# EAGLE board Qwiic Sound Trigger-Panel (EAGLE 9.6.2), part 1 of 5
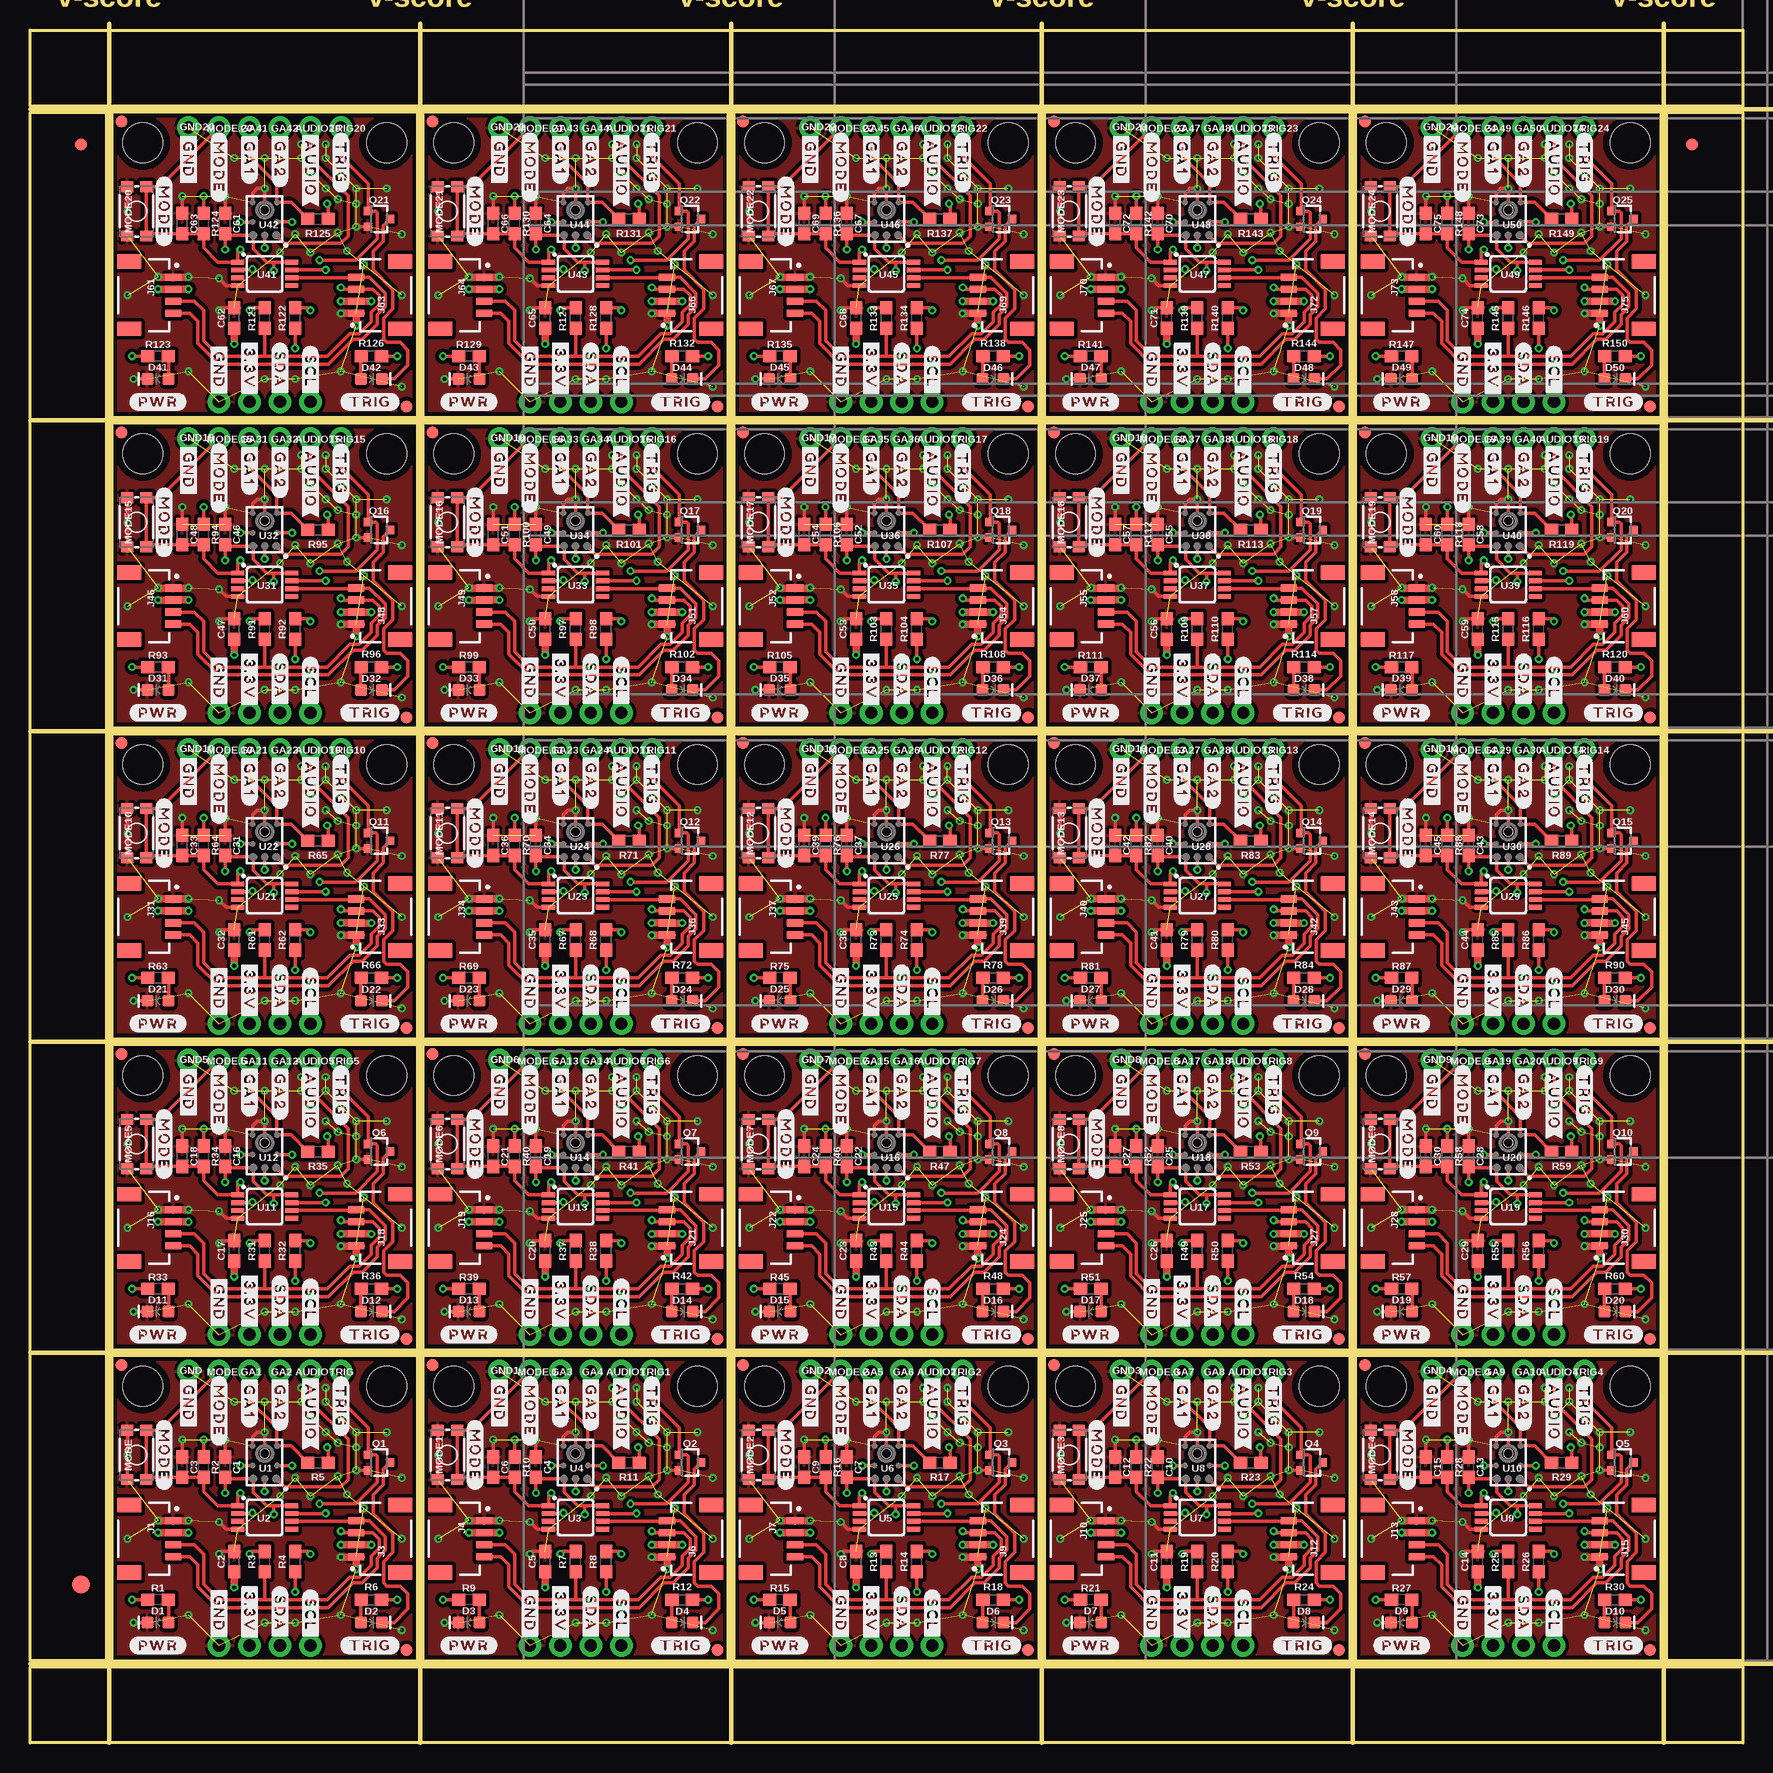
[diagram p0: board, top side]
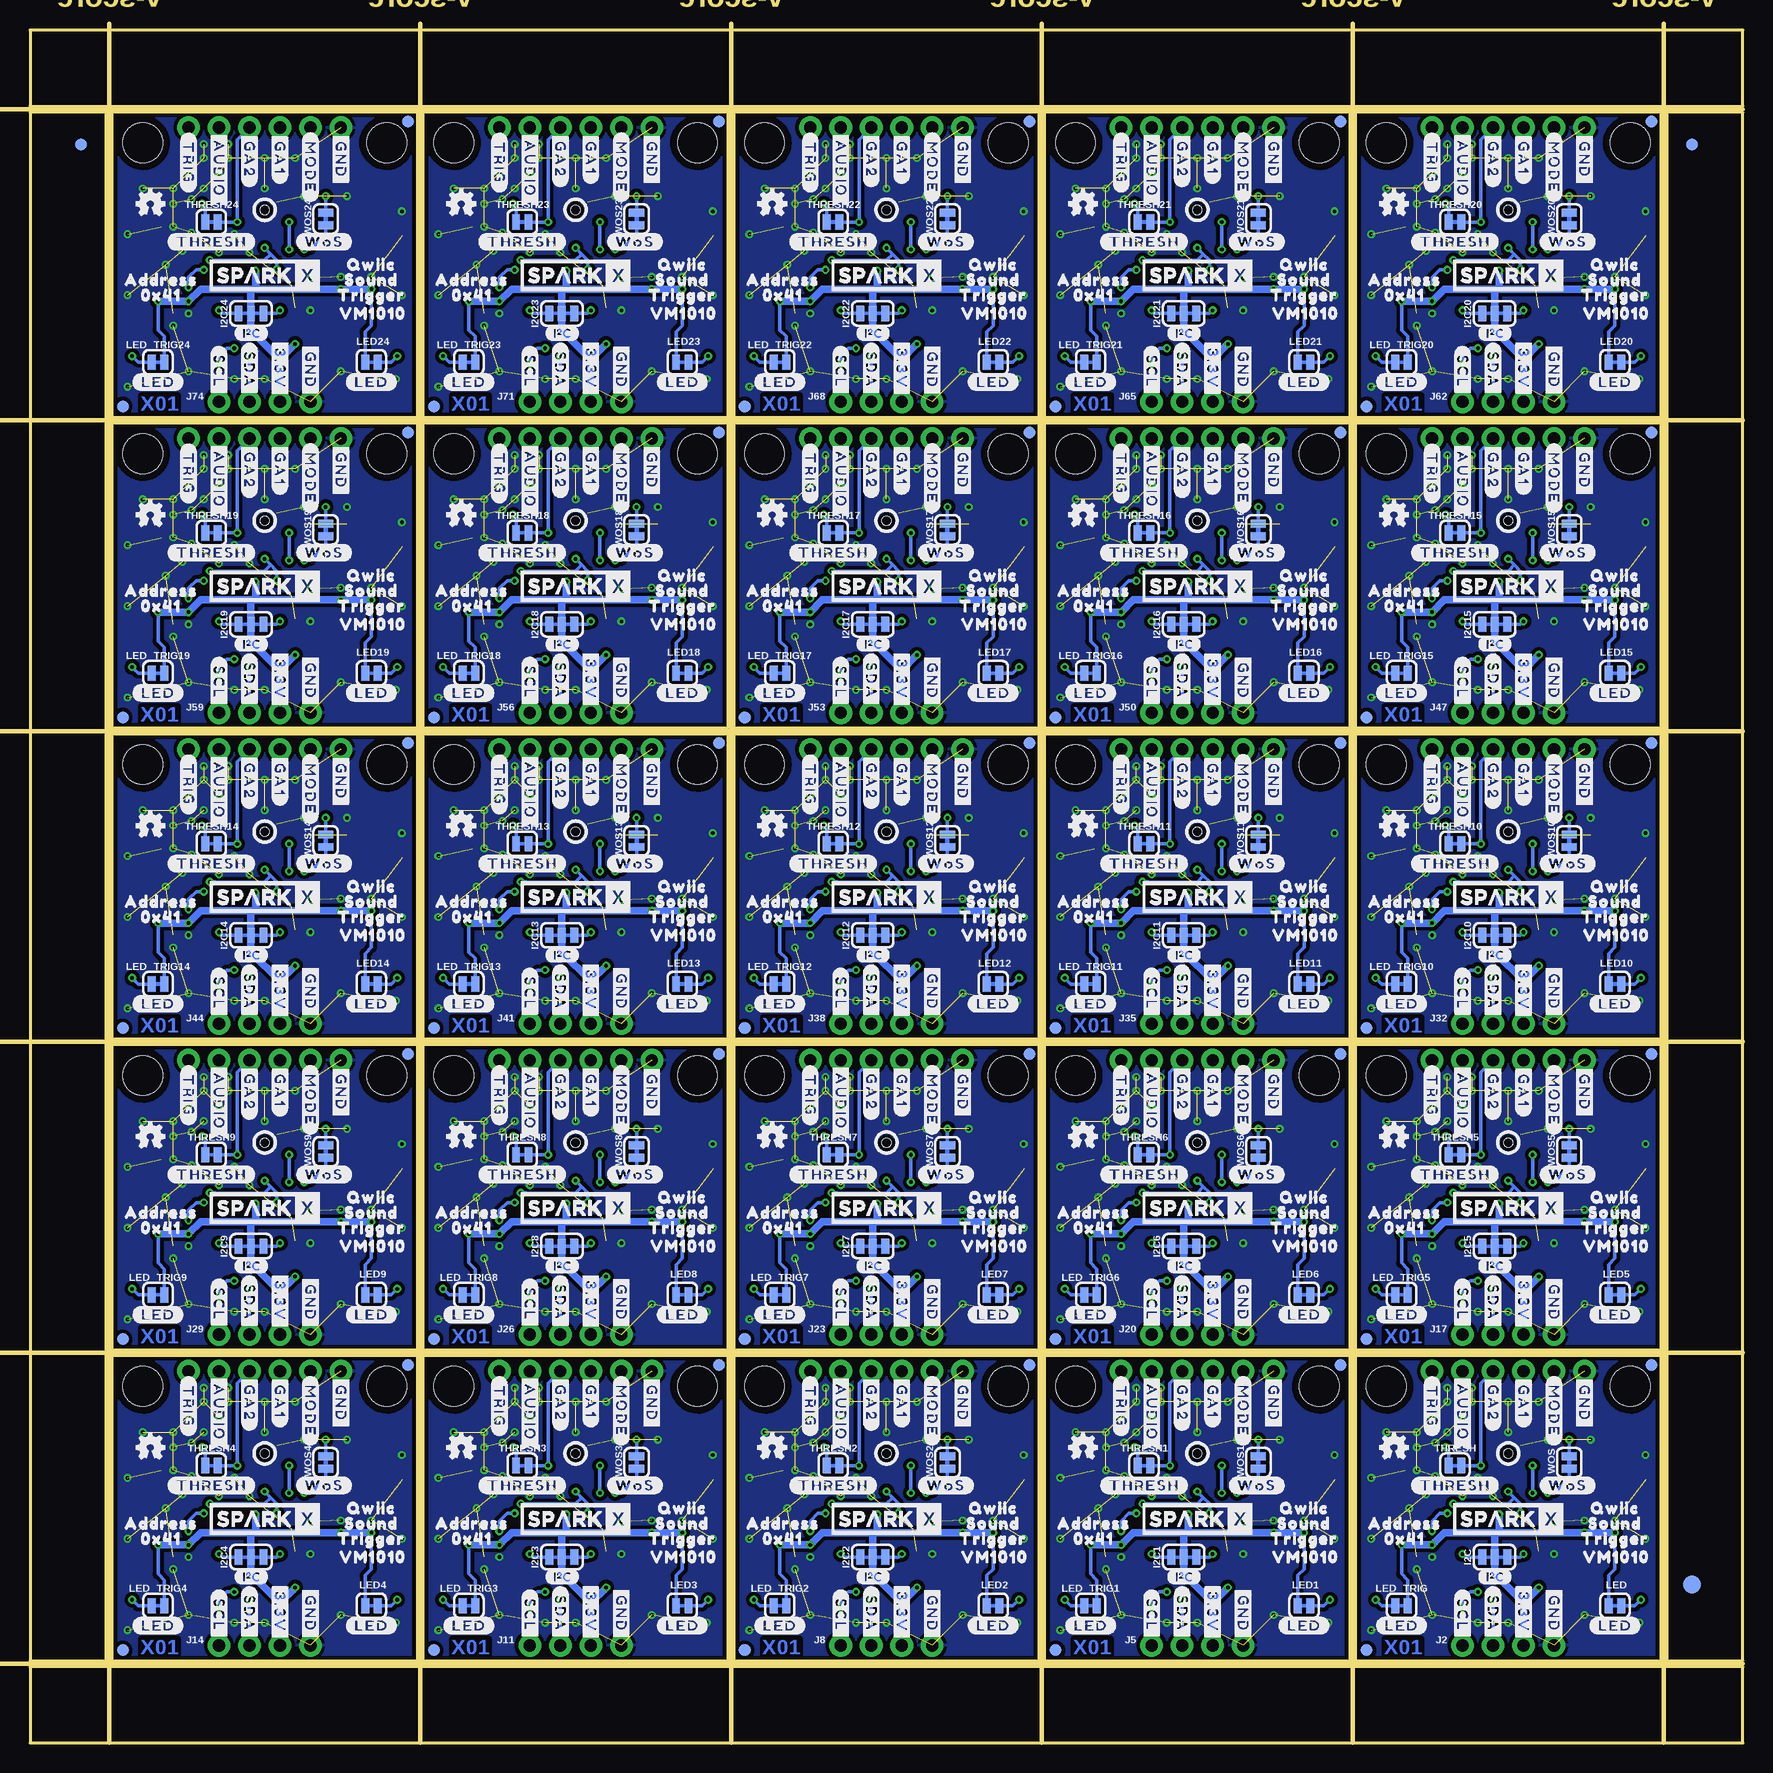
[diagram p1: board, bottom side, seen from below]

Size 142.75 x 142.75 mm. Coordinates in mm from the lower left corner, seen from the top.
Outline: 6.86,6.86 6.86,32.26 32.26,32.26 32.26,6.86 6.86,6.86
Outline: 32.77,6.86 32.77,32.26 58.17,32.26 58.17,6.86 32.77,6.86
Outline: 58.67,6.86 58.67,32.26 84.07,32.26 84.07,6.86 58.67,6.86
Outline: 84.58,6.86 84.58,32.26 109.98,32.26 109.98,6.86 84.58,6.86
Outline: 110.49,6.86 110.49,32.26 135.89,32.26 135.89,6.86 110.49,6.86
Outline: 6.86,32.77 6.86,58.17 32.26,58.17 32.26,32.77 6.86,32.77
Outline: 32.77,32.77 32.77,58.17 58.17,58.17 58.17,32.77 32.77,32.77
Outline: 58.67,32.77 58.67,58.17 84.07,58.17 84.07,32.77 58.67,32.77
Outline: 84.58,32.77 84.58,58.17 109.98,58.17 109.98,32.77 84.58,32.77
Outline: 110.49,32.77 110.49,58.17 135.89,58.17 135.89,32.77 110.49,32.77
Outline: 6.86,58.67 6.86,84.07 32.26,84.07 32.26,58.67 6.86,58.67
Outline: 32.77,58.67 32.77,84.07 58.17,84.07 58.17,58.67 32.77,58.67
Outline: 58.67,58.67 58.67,84.07 84.07,84.07 84.07,58.67 58.67,58.67
Outline: 84.58,58.67 84.58,84.07 109.98,84.07 109.98,58.67 84.58,58.67
Outline: 110.49,58.67 110.49,84.07 135.89,84.07 135.89,58.67 110.49,58.67
Outline: 6.86,84.58 6.86,109.98 32.26,109.98 32.26,84.58 6.86,84.58
Outline: 32.77,84.58 32.77,109.98 58.17,109.98 58.17,84.58 32.77,84.58
Outline: 58.67,84.58 58.67,109.98 84.07,109.98 84.07,84.58 58.67,84.58
Outline: 84.58,84.58 84.58,109.98 109.98,109.98 109.98,84.58 84.58,84.58
Outline: 110.49,84.58 110.49,109.98 135.89,109.98 135.89,84.58 110.49,84.58
Outline: 6.86,110.49 6.86,135.89 32.26,135.89 32.26,110.49 6.86,110.49
Outline: 32.77,110.49 32.77,135.89 58.17,135.89 58.17,110.49 32.77,110.49
Outline: 58.67,110.49 58.67,135.89 84.07,135.89 84.07,110.49 58.67,110.49
Outline: 84.58,110.49 84.58,135.89 109.98,135.89 109.98,110.49 84.58,110.49
Outline: 110.49,110.49 110.49,135.89 135.89,135.89 135.89,110.49 110.49,110.49
Outline: 0,6.35 142.75,6.35 142.75,0 0,0 0,6.35
Outline: 136.4,135.89 142.75,135.89 142.75,6.86 136.4,6.86 136.4,135.89
Outline: 0,142.75 142.75,142.75 142.75,136.4 0,136.4 0,142.75
Outline: 0,135.89 6.35,135.89 6.35,6.86 0,6.86 0,135.89
Copper layers (1*16): Top 0.035mm / dielectric 1.5mm / Bottom 0.035mm
Design rules "Qwiic Sound Trigger": minimum track width 7mil, minimum drill 0.3mm, track to track 7mil, track to pad 7mil, pad to pad 7mil, via to via 7mil, smd to smd 7mil, copper to edge 7mil, drill to drill 7mil, minimum pad ring 7mil, minimum via ring 7mil, stop-mask expansion 3mil, vias tented up to drill 25mil, thermal gap 10mil
Milling: 12 lines

## Footprints (pad centres in the part's own frame; a part is rotated, then mirrored left to right if it is on the bottom)
1X01_NO_SILK = drill 1.016 pad 1.88: 1 0,0
0603 = smd 1.1 x 1: 1 -0.85,0; 2 0.85,0
LED-0603 = smd 1 x 1: A -0.877,0; C 0.877,0
FIDUCIAL-1X2 = smd 1 x 1: 1 0,0
FIDUCIAL-1.5X3 = smd 1.5 x 1.5: 1 0,0
SMT-JUMPER_3_2-NC_TRACE_SILK = smd 0.66 x 1.27: 1 -1.041,0; 2 0,0; 3 1.041,0
JST04_1MM_RA = smd 0.6 x 1.35: 1 -1.5,0; 2 -0.5,0; 3 0.5,0; 4 1.5,0 | smd 1.2 x 2: NC1 2.8,-3.675; NC2 -2.8,-3.675
1X04_NO_SILK = drill 1.016 pad 1.88: 1 0,0; 2 2.54,0; 3 5.08,0; 4 7.62,0
STAND-OFF = hole 3.302: 0,0
SMT-JUMPER_2_NC_TRACE_SILK = smd 0.66 x 1.27: 1 -0.521,0; 2 0.521,0
TACTILE_SWITCH_SMD_4.6X2.8MM = smd 0.9 x 1: 1 -2.05,-0.8; 2 2.05,-0.8; 3 2.05,0.8; 4 -2.05,0.8
SOT323 = smd 0.7 x 0.7: 1 -0.65,-0.925; 2 0.65,-0.925; 3 0,0.925
VM1010 = smd 0.65 x 0.65: 1 1.35,0.965; 6 1.35,-0.965 | smd 0.46 x 0.46: 2 0.25,1.015; 3 -1.39,1.015; 4 -1.39,-1.015; 5 0.25,-1.015 | smd 0.6 x 0.6: 7 1.35,0 | smd 0.25 x 0.25: 8 -1.38,0 | hole 0.75: -0.75,0
MSOP8 = smd 1.1 x 0.4: 1 -2.25,0.975; 2 -2.25,0.325; 3 -2.25,-0.325; 4 -2.25,-0.975; 5 2.25,-0.975; 6 2.25,-0.325; 7 2.25,0.325; 8 2.25,0.975

## Placement (x,y rotation side)
AUDIO  [1X01_NO_SILK]  23.37,30.99 0 top
AUDIO1  [1X01_NO_SILK]  49.28,30.99 0 top
AUDIO2  [1X01_NO_SILK]  75.18,30.99 0 top
AUDIO3  [1X01_NO_SILK]  101.09,30.99 0 top
AUDIO4  [1X01_NO_SILK]  127,30.99 0 top
AUDIO5  [1X01_NO_SILK]  23.37,56.9 0 top
AUDIO6  [1X01_NO_SILK]  49.28,56.9 0 top
AUDIO7  [1X01_NO_SILK]  75.18,56.9 0 top
AUDIO8  [1X01_NO_SILK]  101.09,56.9 0 top
AUDIO9  [1X01_NO_SILK]  127,56.9 0 top
AUDIO10  [1X01_NO_SILK]  23.37,82.8 0 top
AUDIO11  [1X01_NO_SILK]  49.28,82.8 0 top
AUDIO12  [1X01_NO_SILK]  75.18,82.8 0 top
AUDIO13  [1X01_NO_SILK]  101.09,82.8 0 top
AUDIO14  [1X01_NO_SILK]  127,82.8 0 top
AUDIO15  [1X01_NO_SILK]  23.37,108.71 0 top
AUDIO16  [1X01_NO_SILK]  49.28,108.71 0 top
AUDIO17  [1X01_NO_SILK]  75.18,108.71 0 top
AUDIO18  [1X01_NO_SILK]  101.09,108.71 0 top
AUDIO19  [1X01_NO_SILK]  127,108.71 0 top
AUDIO20  [1X01_NO_SILK]  23.37,134.62 0 top
AUDIO21  [1X01_NO_SILK]  49.28,134.62 0 top
AUDIO22  [1X01_NO_SILK]  75.18,134.62 0 top
AUDIO23  [1X01_NO_SILK]  101.09,134.62 0 top
AUDIO24  [1X01_NO_SILK]  127,134.62 0 top
C1  0.1uF  [0603]  16.26,22.99 90 top
C2  1.0uF  [0603]  17.02,15.11 90 top
C3  0.1uF  [0603]  12.7,22.99 90 top
C4  0.1uF  [0603]  42.16,22.99 90 top
C5  1.0uF  [0603]  42.93,15.11 90 top
C6  0.1uF  [0603]  38.61,22.99 90 top
C7  0.1uF  [0603]  68.07,22.99 90 top
C8  1.0uF  [0603]  68.83,15.11 90 top
C9  0.1uF  [0603]  64.52,22.99 90 top
C10  0.1uF  [0603]  93.98,22.99 90 top
C11  1.0uF  [0603]  94.74,15.11 90 top
C12  0.1uF  [0603]  90.42,22.99 90 top
C13  0.1uF  [0603]  119.89,22.99 90 top
C14  1.0uF  [0603]  120.65,15.11 90 top
C15  0.1uF  [0603]  116.33,22.99 90 top
C16  0.1uF  [0603]  16.26,48.89 90 top
C17  1.0uF  [0603]  17.02,41.02 90 top
C18  0.1uF  [0603]  12.7,48.89 90 top
C19  0.1uF  [0603]  42.16,48.89 90 top
C20  1.0uF  [0603]  42.93,41.02 90 top
C21  0.1uF  [0603]  38.61,48.89 90 top
C22  0.1uF  [0603]  68.07,48.89 90 top
C23  1.0uF  [0603]  68.83,41.02 90 top
C24  0.1uF  [0603]  64.52,48.89 90 top
C25  0.1uF  [0603]  93.98,48.89 90 top
C26  1.0uF  [0603]  94.74,41.02 90 top
C27  0.1uF  [0603]  90.42,48.89 90 top
C28  0.1uF  [0603]  119.89,48.89 90 top
C29  1.0uF  [0603]  120.65,41.02 90 top
C30  0.1uF  [0603]  116.33,48.89 90 top
C31  0.1uF  [0603]  16.26,74.8 90 top
C32  1.0uF  [0603]  17.02,66.93 90 top
C33  0.1uF  [0603]  12.7,74.8 90 top
C34  0.1uF  [0603]  42.16,74.8 90 top
C35  1.0uF  [0603]  42.93,66.93 90 top
C36  0.1uF  [0603]  38.61,74.8 90 top
C37  0.1uF  [0603]  68.07,74.8 90 top
C38  1.0uF  [0603]  68.83,66.93 90 top
C39  0.1uF  [0603]  64.52,74.8 90 top
C40  0.1uF  [0603]  93.98,74.8 90 top
C41  1.0uF  [0603]  94.74,66.93 90 top
C42  0.1uF  [0603]  90.42,74.8 90 top
C43  0.1uF  [0603]  119.89,74.8 90 top
C44  1.0uF  [0603]  120.65,66.93 90 top
C45  0.1uF  [0603]  116.33,74.8 90 top
C46  0.1uF  [0603]  16.26,100.71 90 top
C47  1.0uF  [0603]  17.02,92.84 90 top
C48  0.1uF  [0603]  12.7,100.71 90 top
C49  0.1uF  [0603]  42.16,100.71 90 top
C50  1.0uF  [0603]  42.93,92.84 90 top
C51  0.1uF  [0603]  38.61,100.71 90 top
C52  0.1uF  [0603]  68.07,100.71 90 top
C53  1.0uF  [0603]  68.83,92.84 90 top
C54  0.1uF  [0603]  64.52,100.71 90 top
C55  0.1uF  [0603]  93.98,100.71 90 top
C56  1.0uF  [0603]  94.74,92.84 90 top
C57  0.1uF  [0603]  90.42,100.71 90 top
C58  0.1uF  [0603]  119.89,100.71 90 top
C59  1.0uF  [0603]  120.65,92.84 90 top
C60  0.1uF  [0603]  116.33,100.71 90 top
C61  0.1uF  [0603]  16.26,126.62 90 top
C62  1.0uF  [0603]  17.02,118.75 90 top
C63  0.1uF  [0603]  12.7,126.62 90 top
C64  0.1uF  [0603]  42.16,126.62 90 top
C65  1.0uF  [0603]  42.93,118.75 90 top
C66  0.1uF  [0603]  38.61,126.62 90 top
C67  0.1uF  [0603]  68.07,126.62 90 top
C68  1.0uF  [0603]  68.83,118.75 90 top
C69  0.1uF  [0603]  64.52,126.62 90 top
C70  0.1uF  [0603]  93.98,126.62 90 top
C71  1.0uF  [0603]  94.74,118.75 90 top
C72  0.1uF  [0603]  90.42,126.62 90 top
C73  0.1uF  [0603]  119.89,126.62 90 top
C74  1.0uF  [0603]  120.65,118.75 90 top
C75  0.1uF  [0603]  116.33,126.62 90 top
D1  RED  [LED-0603]  10.67,10.03 180 top
D2  RED  [LED-0603]  28.45,10.03 0 top
D3  RED  [LED-0603]  36.58,10.03 180 top
D4  RED  [LED-0603]  54.36,10.03 0 top
D5  RED  [LED-0603]  62.48,10.03 180 top
D6  RED  [LED-0603]  80.26,10.03 0 top
D7  RED  [LED-0603]  88.39,10.03 180 top
D8  RED  [LED-0603]  106.17,10.03 0 top
D9  RED  [LED-0603]  114.3,10.03 180 top
D10  RED  [LED-0603]  132.08,10.03 0 top
D11  RED  [LED-0603]  10.67,35.94 180 top
D12  RED  [LED-0603]  28.45,35.94 0 top
D13  RED  [LED-0603]  36.58,35.94 180 top
D14  RED  [LED-0603]  54.36,35.94 0 top
D15  RED  [LED-0603]  62.48,35.94 180 top
D16  RED  [LED-0603]  80.26,35.94 0 top
D17  RED  [LED-0603]  88.39,35.94 180 top
D18  RED  [LED-0603]  106.17,35.94 0 top
D19  RED  [LED-0603]  114.3,35.94 180 top
D20  RED  [LED-0603]  132.08,35.94 0 top
D21  RED  [LED-0603]  10.67,61.85 180 top
D22  RED  [LED-0603]  28.45,61.85 0 top
D23  RED  [LED-0603]  36.58,61.85 180 top
D24  RED  [LED-0603]  54.36,61.85 0 top
D25  RED  [LED-0603]  62.48,61.85 180 top
D26  RED  [LED-0603]  80.26,61.85 0 top
D27  RED  [LED-0603]  88.39,61.85 180 top
D28  RED  [LED-0603]  106.17,61.85 0 top
D29  RED  [LED-0603]  114.3,61.85 180 top
D30  RED  [LED-0603]  132.08,61.85 0 top
D31  RED  [LED-0603]  10.67,87.76 180 top
D32  RED  [LED-0603]  28.45,87.76 0 top
D33  RED  [LED-0603]  36.58,87.76 180 top
D34  RED  [LED-0603]  54.36,87.76 0 top
D35  RED  [LED-0603]  62.48,87.76 180 top
D36  RED  [LED-0603]  80.26,87.76 0 top
D37  RED  [LED-0603]  88.39,87.76 180 top
D38  RED  [LED-0603]  106.17,87.76 0 top
D39  RED  [LED-0603]  114.3,87.76 180 top
D40  RED  [LED-0603]  132.08,87.76 0 top
D41  RED  [LED-0603]  10.67,113.67 180 top
D42  RED  [LED-0603]  28.45,113.67 0 top
D43  RED  [LED-0603]  36.58,113.67 180 top
D44  RED  [LED-0603]  54.36,113.67 0 top
D45  RED  [LED-0603]  62.48,113.67 180 top
D46  RED  [LED-0603]  80.26,113.67 0 top
D47  RED  [LED-0603]  88.39,113.67 180 top
D48  RED  [LED-0603]  106.17,113.67 0 top
D49  RED  [LED-0603]  114.3,113.67 180 top
D50  RED  [LED-0603]  132.08,113.67 0 top
E$1  [FIDUCIAL-1X2]  4.23,133.22 0 top
E$2  [FIDUCIAL-1X2]  4.23,133.22 0 bottom
E$3  [FIDUCIAL-1X2]  138.51,133.22 0 top
E$4  [FIDUCIAL-1X2]  138.51,133.22 0 bottom
E$5  [FIDUCIAL-1.5X3]  4.23,13.21 0 top
E$6  [FIDUCIAL-1.5X3]  4.23,13.21 0 bottom
GA1  [1X01_NO_SILK]  18.29,30.99 0 top
GA2  [1X01_NO_SILK]  20.83,30.99 0 top
GA3  [1X01_NO_SILK]  44.2,30.99 0 top
GA4  [1X01_NO_SILK]  46.74,30.99 0 top
GA5  [1X01_NO_SILK]  70.1,30.99 0 top
GA6  [1X01_NO_SILK]  72.64,30.99 0 top
GA7  [1X01_NO_SILK]  96.01,30.99 0 top
GA8  [1X01_NO_SILK]  98.55,30.99 0 top
GA9  [1X01_NO_SILK]  121.92,30.99 0 top
GA10  [1X01_NO_SILK]  124.46,30.99 0 top
GA11  [1X01_NO_SILK]  18.29,56.9 0 top
GA12  [1X01_NO_SILK]  20.83,56.9 0 top
GA13  [1X01_NO_SILK]  44.2,56.9 0 top
GA14  [1X01_NO_SILK]  46.74,56.9 0 top
GA15  [1X01_NO_SILK]  70.1,56.9 0 top
GA16  [1X01_NO_SILK]  72.64,56.9 0 top
GA17  [1X01_NO_SILK]  96.01,56.9 0 top
GA18  [1X01_NO_SILK]  98.55,56.9 0 top
GA19  [1X01_NO_SILK]  121.92,56.9 0 top
GA20  [1X01_NO_SILK]  124.46,56.9 0 top
GA21  [1X01_NO_SILK]  18.29,82.8 0 top
GA22  [1X01_NO_SILK]  20.83,82.8 0 top
GA23  [1X01_NO_SILK]  44.2,82.8 0 top
GA24  [1X01_NO_SILK]  46.74,82.8 0 top
GA25  [1X01_NO_SILK]  70.1,82.8 0 top
GA26  [1X01_NO_SILK]  72.64,82.8 0 top
GA27  [1X01_NO_SILK]  96.01,82.8 0 top
GA28  [1X01_NO_SILK]  98.55,82.8 0 top
GA29  [1X01_NO_SILK]  121.92,82.8 0 top
GA30  [1X01_NO_SILK]  124.46,82.8 0 top
GA31  [1X01_NO_SILK]  18.29,108.71 0 top
GA32  [1X01_NO_SILK]  20.83,108.71 0 top
GA33  [1X01_NO_SILK]  44.2,108.71 0 top
GA34  [1X01_NO_SILK]  46.74,108.71 0 top
GA35  [1X01_NO_SILK]  70.1,108.71 0 top
GA36  [1X01_NO_SILK]  72.64,108.71 0 top
GA37  [1X01_NO_SILK]  96.01,108.71 0 top
GA38  [1X01_NO_SILK]  98.55,108.71 0 top
GA39  [1X01_NO_SILK]  121.92,108.71 0 top
GA40  [1X01_NO_SILK]  124.46,108.71 0 top
GA41  [1X01_NO_SILK]  18.29,134.62 0 top
GA42  [1X01_NO_SILK]  20.83,134.62 0 top
GA43  [1X01_NO_SILK]  44.2,134.62 0 top
GA44  [1X01_NO_SILK]  46.74,134.62 0 top
GA45  [1X01_NO_SILK]  70.1,134.62 0 top
GA46  [1X01_NO_SILK]  72.64,134.62 0 top
GA47  [1X01_NO_SILK]  96.01,134.62 0 top
GA48  [1X01_NO_SILK]  98.55,134.62 0 top
GA49  [1X01_NO_SILK]  121.92,134.62 0 top
GA50  [1X01_NO_SILK]  124.46,134.62 0 top
GND  [1X01_NO_SILK]  13.21,30.99 0 top
GND1  [1X01_NO_SILK]  39.12,30.99 0 top
GND2  [1X01_NO_SILK]  65.02,30.99 0 top
GND3  [1X01_NO_SILK]  90.93,30.99 0 top
GND4  [1X01_NO_SILK]  116.84,30.99 0 top
GND5  [1X01_NO_SILK]  13.21,56.9 0 top
GND6  [1X01_NO_SILK]  39.12,56.9 0 top
GND7  [1X01_NO_SILK]  65.02,56.9 0 top
GND8  [1X01_NO_SILK]  90.93,56.9 0 top
GND9  [1X01_NO_SILK]  116.84,56.9 0 top
GND10  [1X01_NO_SILK]  13.21,82.8 0 top
GND11  [1X01_NO_SILK]  39.12,82.8 0 top
GND12  [1X01_NO_SILK]  65.02,82.8 0 top
GND13  [1X01_NO_SILK]  90.93,82.8 0 top
GND14  [1X01_NO_SILK]  116.84,82.8 0 top
GND15  [1X01_NO_SILK]  13.21,108.71 0 top
GND16  [1X01_NO_SILK]  39.12,108.71 0 top
GND17  [1X01_NO_SILK]  65.02,108.71 0 top
GND18  [1X01_NO_SILK]  90.93,108.71 0 top
GND19  [1X01_NO_SILK]  116.84,108.71 0 top
GND20  [1X01_NO_SILK]  13.21,134.62 0 top
GND21  [1X01_NO_SILK]  39.12,134.62 0 top
GND22  [1X01_NO_SILK]  65.02,134.62 0 top
GND23  [1X01_NO_SILK]  90.93,134.62 0 top
GND24  [1X01_NO_SILK]  116.84,134.62 0 top
I2C  JUMPER-SMT_3_2-NC_TRACE_SILK  [SMT-JUMPER_3_2-NC_TRACE_SILK]  20.7,15.49 0 bottom
I2C1  JUMPER-SMT_3_2-NC_TRACE_SILK  [SMT-JUMPER_3_2-NC_TRACE_SILK]  46.61,15.49 0 bottom
I2C2  JUMPER-SMT_3_2-NC_TRACE_SILK  [SMT-JUMPER_3_2-NC_TRACE_SILK]  72.52,15.49 0 bottom
I2C3  JUMPER-SMT_3_2-NC_TRACE_SILK  [SMT-JUMPER_3_2-NC_TRACE_SILK]  98.42,15.49 0 bottom
I2C4  JUMPER-SMT_3_2-NC_TRACE_SILK  [SMT-JUMPER_3_2-NC_TRACE_SILK]  124.33,15.49 0 bottom
I2C5  JUMPER-SMT_3_2-NC_TRACE_SILK  [SMT-JUMPER_3_2-NC_TRACE_SILK]  20.7,41.4 0 bottom
I2C6  JUMPER-SMT_3_2-NC_TRACE_SILK  [SMT-JUMPER_3_2-NC_TRACE_SILK]  46.61,41.4 0 bottom
I2C7  JUMPER-SMT_3_2-NC_TRACE_SILK  [SMT-JUMPER_3_2-NC_TRACE_SILK]  72.52,41.4 0 bottom
I2C8  JUMPER-SMT_3_2-NC_TRACE_SILK  [SMT-JUMPER_3_2-NC_TRACE_SILK]  98.42,41.4 0 bottom
I2C9  JUMPER-SMT_3_2-NC_TRACE_SILK  [SMT-JUMPER_3_2-NC_TRACE_SILK]  124.33,41.4 0 bottom
I2C10  JUMPER-SMT_3_2-NC_TRACE_SILK  [SMT-JUMPER_3_2-NC_TRACE_SILK]  20.7,67.31 0 bottom
I2C11  JUMPER-SMT_3_2-NC_TRACE_SILK  [SMT-JUMPER_3_2-NC_TRACE_SILK]  46.61,67.31 0 bottom
I2C12  JUMPER-SMT_3_2-NC_TRACE_SILK  [SMT-JUMPER_3_2-NC_TRACE_SILK]  72.52,67.31 0 bottom
I2C13  JUMPER-SMT_3_2-NC_TRACE_SILK  [SMT-JUMPER_3_2-NC_TRACE_SILK]  98.42,67.31 0 bottom
I2C14  JUMPER-SMT_3_2-NC_TRACE_SILK  [SMT-JUMPER_3_2-NC_TRACE_SILK]  124.33,67.31 0 bottom
I2C15  JUMPER-SMT_3_2-NC_TRACE_SILK  [SMT-JUMPER_3_2-NC_TRACE_SILK]  20.7,93.22 0 bottom
I2C16  JUMPER-SMT_3_2-NC_TRACE_SILK  [SMT-JUMPER_3_2-NC_TRACE_SILK]  46.61,93.22 0 bottom
I2C17  JUMPER-SMT_3_2-NC_TRACE_SILK  [SMT-JUMPER_3_2-NC_TRACE_SILK]  72.52,93.22 0 bottom
I2C18  JUMPER-SMT_3_2-NC_TRACE_SILK  [SMT-JUMPER_3_2-NC_TRACE_SILK]  98.42,93.22 0 bottom
I2C19  JUMPER-SMT_3_2-NC_TRACE_SILK  [SMT-JUMPER_3_2-NC_TRACE_SILK]  124.33,93.22 0 bottom
I2C20  JUMPER-SMT_3_2-NC_TRACE_SILK  [SMT-JUMPER_3_2-NC_TRACE_SILK]  20.7,119.13 0 bottom
I2C21  JUMPER-SMT_3_2-NC_TRACE_SILK  [SMT-JUMPER_3_2-NC_TRACE_SILK]  46.61,119.13 0 bottom
I2C22  JUMPER-SMT_3_2-NC_TRACE_SILK  [SMT-JUMPER_3_2-NC_TRACE_SILK]  72.52,119.13 0 bottom
I2C23  JUMPER-SMT_3_2-NC_TRACE_SILK  [SMT-JUMPER_3_2-NC_TRACE_SILK]  98.42,119.13 0 bottom
I2C24  JUMPER-SMT_3_2-NC_TRACE_SILK  [SMT-JUMPER_3_2-NC_TRACE_SILK]  124.33,119.13 0 bottom
J1  Qwiic Right Angle  [JST04_1MM_RA]  11.94,17.02 270 top
J2  PTH  [1X04_NO_SILK]  15.75,8.13 180 bottom
J3  Qwiic Right Angle  [JST04_1MM_RA]  27.18,17.02 90 top
J4  Qwiic Right Angle  [JST04_1MM_RA]  37.85,17.02 270 top
J5  PTH  [1X04_NO_SILK]  41.66,8.13 180 bottom
J6  Qwiic Right Angle  [JST04_1MM_RA]  53.09,17.02 90 top
J7  Qwiic Right Angle  [JST04_1MM_RA]  63.75,17.02 270 top
J8  PTH  [1X04_NO_SILK]  67.56,8.13 180 bottom
J9  Qwiic Right Angle  [JST04_1MM_RA]  78.99,17.02 90 top
J10  Qwiic Right Angle  [JST04_1MM_RA]  89.66,17.02 270 top
J11  PTH  [1X04_NO_SILK]  93.47,8.13 180 bottom
J12  Qwiic Right Angle  [JST04_1MM_RA]  104.9,17.02 90 top
J13  Qwiic Right Angle  [JST04_1MM_RA]  115.57,17.02 270 top
J14  PTH  [1X04_NO_SILK]  119.38,8.13 180 bottom
J15  Qwiic Right Angle  [JST04_1MM_RA]  130.81,17.02 90 top
J16  Qwiic Right Angle  [JST04_1MM_RA]  11.94,42.93 270 top
J17  PTH  [1X04_NO_SILK]  15.75,34.04 180 bottom
J18  Qwiic Right Angle  [JST04_1MM_RA]  27.18,42.93 90 top
J19  Qwiic Right Angle  [JST04_1MM_RA]  37.85,42.93 270 top
J20  PTH  [1X04_NO_SILK]  41.66,34.04 180 bottom
J21  Qwiic Right Angle  [JST04_1MM_RA]  53.09,42.93 90 top
J22  Qwiic Right Angle  [JST04_1MM_RA]  63.75,42.93 270 top
J23  PTH  [1X04_NO_SILK]  67.56,34.04 180 bottom
J24  Qwiic Right Angle  [JST04_1MM_RA]  78.99,42.93 90 top
J25  Qwiic Right Angle  [JST04_1MM_RA]  89.66,42.93 270 top
J26  PTH  [1X04_NO_SILK]  93.47,34.04 180 bottom
J27  Qwiic Right Angle  [JST04_1MM_RA]  104.9,42.93 90 top
J28  Qwiic Right Angle  [JST04_1MM_RA]  115.57,42.93 270 top
J29  PTH  [1X04_NO_SILK]  119.38,34.04 180 bottom
J30  Qwiic Right Angle  [JST04_1MM_RA]  130.81,42.93 90 top
J31  Qwiic Right Angle  [JST04_1MM_RA]  11.94,68.83 270 top
J32  PTH  [1X04_NO_SILK]  15.75,59.94 180 bottom
J33  Qwiic Right Angle  [JST04_1MM_RA]  27.18,68.83 90 top
J34  Qwiic Right Angle  [JST04_1MM_RA]  37.85,68.83 270 top
J35  PTH  [1X04_NO_SILK]  41.66,59.94 180 bottom
J36  Qwiic Right Angle  [JST04_1MM_RA]  53.09,68.83 90 top
J37  Qwiic Right Angle  [JST04_1MM_RA]  63.75,68.83 270 top
J38  PTH  [1X04_NO_SILK]  67.56,59.94 180 bottom
J39  Qwiic Right Angle  [JST04_1MM_RA]  78.99,68.83 90 top
J40  Qwiic Right Angle  [JST04_1MM_RA]  89.66,68.83 270 top
J41  PTH  [1X04_NO_SILK]  93.47,59.94 180 bottom
J42  Qwiic Right Angle  [JST04_1MM_RA]  104.9,68.83 90 top
J43  Qwiic Right Angle  [JST04_1MM_RA]  115.57,68.83 270 top
J44  PTH  [1X04_NO_SILK]  119.38,59.94 180 bottom
J45  Qwiic Right Angle  [JST04_1MM_RA]  130.81,68.83 90 top
J46  Qwiic Right Angle  [JST04_1MM_RA]  11.94,94.74 270 top
J47  PTH  [1X04_NO_SILK]  15.75,85.85 180 bottom
J48  Qwiic Right Angle  [JST04_1MM_RA]  27.18,94.74 90 top
J49  Qwiic Right Angle  [JST04_1MM_RA]  37.85,94.74 270 top
J50  PTH  [1X04_NO_SILK]  41.66,85.85 180 bottom
J51  Qwiic Right Angle  [JST04_1MM_RA]  53.09,94.74 90 top
J52  Qwiic Right Angle  [JST04_1MM_RA]  63.75,94.74 270 top
J53  PTH  [1X04_NO_SILK]  67.56,85.85 180 bottom
J54  Qwiic Right Angle  [JST04_1MM_RA]  78.99,94.74 90 top
J55  Qwiic Right Angle  [JST04_1MM_RA]  89.66,94.74 270 top
J56  PTH  [1X04_NO_SILK]  93.47,85.85 180 bottom
J57  Qwiic Right Angle  [JST04_1MM_RA]  104.9,94.74 90 top
J58  Qwiic Right Angle  [JST04_1MM_RA]  115.57,94.74 270 top
J59  PTH  [1X04_NO_SILK]  119.38,85.85 180 bottom
J60  Qwiic Right Angle  [JST04_1MM_RA]  130.81,94.74 90 top
J61  Qwiic Right Angle  [JST04_1MM_RA]  11.94,120.65 270 top
J62  PTH  [1X04_NO_SILK]  15.75,111.76 180 bottom
J63  Qwiic Right Angle  [JST04_1MM_RA]  27.18,120.65 90 top
J64  Qwiic Right Angle  [JST04_1MM_RA]  37.85,120.65 270 top
J65  PTH  [1X04_NO_SILK]  41.66,111.76 180 bottom
J66  Qwiic Right Angle  [JST04_1MM_RA]  53.09,120.65 90 top
J67  Qwiic Right Angle  [JST04_1MM_RA]  63.75,120.65 270 top
J68  PTH  [1X04_NO_SILK]  67.56,111.76 180 bottom
J69  Qwiic Right Angle  [JST04_1MM_RA]  78.99,120.65 90 top
J70  Qwiic Right Angle  [JST04_1MM_RA]  89.66,120.65 270 top
J71  PTH  [1X04_NO_SILK]  93.47,111.76 180 bottom
J72  Qwiic Right Angle  [JST04_1MM_RA]  104.9,120.65 90 top
J73  Qwiic Right Angle  [JST04_1MM_RA]  115.57,120.65 270 top
J74  PTH  [1X04_NO_SILK]  119.38,111.76 180 bottom
J75  Qwiic Right Angle  [JST04_1MM_RA]  130.81,120.65 90 top
JP1  FIDUCIAL1X2  [FIDUCIAL-1X2]  7.62,31.5 0 bottom
JP2  FIDUCIAL1X2  [FIDUCIAL-1X2]  31.37,7.75 0 top
JP3  STAND-OFF  [STAND-OFF]  9.4,29.72 0 top
JP4  STAND-OFF  [STAND-OFF]  29.72,29.72 0 top
JP5  FIDUCIAL1X2  [FIDUCIAL-1X2]  31.37,7.75 0 bottom
JP6  FIDUCIAL1X2  [FIDUCIAL-1X2]  7.62,31.5 0 top
JP7  STAND-OFF  [STAND-OFF]  35.31,29.72 0 top
JP8  STAND-OFF  [STAND-OFF]  55.63,29.72 0 top
JP9  FIDUCIAL1X2  [FIDUCIAL-1X2]  57.28,7.75 0 top
JP10  FIDUCIAL1X2  [FIDUCIAL-1X2]  33.53,31.5 0 top
JP11  FIDUCIAL1X2  [FIDUCIAL-1X2]  33.53,31.5 0 bottom
JP12  FIDUCIAL1X2  [FIDUCIAL-1X2]  57.28,7.75 0 bottom
JP13  STAND-OFF  [STAND-OFF]  61.21,29.72 0 top
JP14  STAND-OFF  [STAND-OFF]  81.53,29.72 0 top
JP15  FIDUCIAL1X2  [FIDUCIAL-1X2]  83.19,7.75 0 top
JP16  FIDUCIAL1X2  [FIDUCIAL-1X2]  59.44,31.5 0 top
JP17  FIDUCIAL1X2  [FIDUCIAL-1X2]  59.44,31.5 0 bottom
JP18  FIDUCIAL1X2  [FIDUCIAL-1X2]  83.19,7.75 0 bottom
JP19  STAND-OFF  [STAND-OFF]  87.12,29.72 0 top
JP20  STAND-OFF  [STAND-OFF]  107.44,29.72 0 top
JP21  FIDUCIAL1X2  [FIDUCIAL-1X2]  109.09,7.75 0 top
JP22  FIDUCIAL1X2  [FIDUCIAL-1X2]  85.34,31.5 0 top
JP23  FIDUCIAL1X2  [FIDUCIAL-1X2]  85.34,31.5 0 bottom
JP24  FIDUCIAL1X2  [FIDUCIAL-1X2]  109.09,7.75 0 bottom
JP25  STAND-OFF  [STAND-OFF]  113.03,29.72 0 top
JP26  STAND-OFF  [STAND-OFF]  133.35,29.72 0 top
JP27  FIDUCIAL1X2  [FIDUCIAL-1X2]  135,7.75 0 top
JP28  FIDUCIAL1X2  [FIDUCIAL-1X2]  111.25,31.5 0 top
JP29  FIDUCIAL1X2  [FIDUCIAL-1X2]  111.25,31.5 0 bottom
JP30  FIDUCIAL1X2  [FIDUCIAL-1X2]  135,7.75 0 bottom
JP31  STAND-OFF  [STAND-OFF]  9.4,55.63 0 top
JP32  STAND-OFF  [STAND-OFF]  29.72,55.63 0 top
JP33  FIDUCIAL1X2  [FIDUCIAL-1X2]  31.37,33.66 0 top
JP34  FIDUCIAL1X2  [FIDUCIAL-1X2]  7.62,57.4 0 top
JP35  FIDUCIAL1X2  [FIDUCIAL-1X2]  7.62,57.4 0 bottom
JP36  FIDUCIAL1X2  [FIDUCIAL-1X2]  31.37,33.66 0 bottom
JP37  STAND-OFF  [STAND-OFF]  35.31,55.63 0 top
JP38  STAND-OFF  [STAND-OFF]  55.63,55.63 0 top
JP39  FIDUCIAL1X2  [FIDUCIAL-1X2]  57.28,33.66 0 top
JP40  FIDUCIAL1X2  [FIDUCIAL-1X2]  33.53,57.4 0 top
JP41  FIDUCIAL1X2  [FIDUCIAL-1X2]  33.53,57.4 0 bottom
JP42  FIDUCIAL1X2  [FIDUCIAL-1X2]  57.28,33.66 0 bottom
JP43  STAND-OFF  [STAND-OFF]  61.21,55.63 0 top
JP44  STAND-OFF  [STAND-OFF]  81.53,55.63 0 top
JP45  FIDUCIAL1X2  [FIDUCIAL-1X2]  83.19,33.66 0 top
JP46  FIDUCIAL1X2  [FIDUCIAL-1X2]  59.44,57.4 0 top
JP47  FIDUCIAL1X2  [FIDUCIAL-1X2]  59.44,57.4 0 bottom
JP48  FIDUCIAL1X2  [FIDUCIAL-1X2]  83.19,33.66 0 bottom
JP49  STAND-OFF  [STAND-OFF]  87.12,55.63 0 top
JP50  STAND-OFF  [STAND-OFF]  107.44,55.63 0 top
JP51  FIDUCIAL1X2  [FIDUCIAL-1X2]  109.09,33.66 0 top
JP52  FIDUCIAL1X2  [FIDUCIAL-1X2]  85.34,57.4 0 top
JP53  FIDUCIAL1X2  [FIDUCIAL-1X2]  85.34,57.4 0 bottom
JP54  FIDUCIAL1X2  [FIDUCIAL-1X2]  109.09,33.66 0 bottom
JP55  STAND-OFF  [STAND-OFF]  113.03,55.63 0 top
JP56  STAND-OFF  [STAND-OFF]  133.35,55.63 0 top
JP57  FIDUCIAL1X2  [FIDUCIAL-1X2]  135,33.66 0 top
JP58  FIDUCIAL1X2  [FIDUCIAL-1X2]  111.25,57.4 0 top
JP59  FIDUCIAL1X2  [FIDUCIAL-1X2]  111.25,57.4 0 bottom
JP60  FIDUCIAL1X2  [FIDUCIAL-1X2]  135,33.66 0 bottom
JP61  STAND-OFF  [STAND-OFF]  9.4,81.53 0 top
JP62  STAND-OFF  [STAND-OFF]  29.72,81.53 0 top
JP63  FIDUCIAL1X2  [FIDUCIAL-1X2]  31.37,59.56 0 top
JP64  FIDUCIAL1X2  [FIDUCIAL-1X2]  7.62,83.31 0 top
JP65  FIDUCIAL1X2  [FIDUCIAL-1X2]  7.62,83.31 0 bottom
JP66  FIDUCIAL1X2  [FIDUCIAL-1X2]  31.37,59.56 0 bottom
JP67  STAND-OFF  [STAND-OFF]  35.31,81.53 0 top
JP68  STAND-OFF  [STAND-OFF]  55.63,81.53 0 top
JP69  FIDUCIAL1X2  [FIDUCIAL-1X2]  57.28,59.56 0 top
JP70  FIDUCIAL1X2  [FIDUCIAL-1X2]  33.53,83.31 0 top
JP71  FIDUCIAL1X2  [FIDUCIAL-1X2]  33.53,83.31 0 bottom
JP72  FIDUCIAL1X2  [FIDUCIAL-1X2]  57.28,59.56 0 bottom
JP73  STAND-OFF  [STAND-OFF]  61.21,81.53 0 top
JP74  STAND-OFF  [STAND-OFF]  81.53,81.53 0 top
JP75  FIDUCIAL1X2  [FIDUCIAL-1X2]  83.19,59.56 0 top
JP76  FIDUCIAL1X2  [FIDUCIAL-1X2]  59.44,83.31 0 top
JP77  FIDUCIAL1X2  [FIDUCIAL-1X2]  59.44,83.31 0 bottom
JP78  FIDUCIAL1X2  [FIDUCIAL-1X2]  83.19,59.56 0 bottom
JP79  STAND-OFF  [STAND-OFF]  87.12,81.53 0 top
JP80  STAND-OFF  [STAND-OFF]  107.44,81.53 0 top
JP81  FIDUCIAL1X2  [FIDUCIAL-1X2]  109.09,59.56 0 top
JP82  FIDUCIAL1X2  [FIDUCIAL-1X2]  85.34,83.31 0 top
JP83  FIDUCIAL1X2  [FIDUCIAL-1X2]  85.34,83.31 0 bottom
JP84  FIDUCIAL1X2  [FIDUCIAL-1X2]  109.09,59.56 0 bottom
JP85  STAND-OFF  [STAND-OFF]  113.03,81.53 0 top
JP86  STAND-OFF  [STAND-OFF]  133.35,81.53 0 top
JP87  FIDUCIAL1X2  [FIDUCIAL-1X2]  135,59.56 0 top
JP88  FIDUCIAL1X2  [FIDUCIAL-1X2]  111.25,83.31 0 top
JP89  FIDUCIAL1X2  [FIDUCIAL-1X2]  111.25,83.31 0 bottom
JP90  FIDUCIAL1X2  [FIDUCIAL-1X2]  135,59.56 0 bottom
JP91  STAND-OFF  [STAND-OFF]  9.4,107.44 0 top
JP92  STAND-OFF  [STAND-OFF]  29.72,107.44 0 top
JP93  FIDUCIAL1X2  [FIDUCIAL-1X2]  31.37,85.47 0 top
JP94  FIDUCIAL1X2  [FIDUCIAL-1X2]  7.62,109.22 0 top
JP95  FIDUCIAL1X2  [FIDUCIAL-1X2]  7.62,109.22 0 bottom
JP96  FIDUCIAL1X2  [FIDUCIAL-1X2]  31.37,85.47 0 bottom
JP97  STAND-OFF  [STAND-OFF]  35.31,107.44 0 top
JP98  STAND-OFF  [STAND-OFF]  55.63,107.44 0 top
JP99  FIDUCIAL1X2  [FIDUCIAL-1X2]  57.28,85.47 0 top
JP100  FIDUCIAL1X2  [FIDUCIAL-1X2]  33.53,109.22 0 top
JP101  FIDUCIAL1X2  [FIDUCIAL-1X2]  33.53,109.22 0 bottom
JP102  FIDUCIAL1X2  [FIDUCIAL-1X2]  57.28,85.47 0 bottom
JP103  STAND-OFF  [STAND-OFF]  61.21,107.44 0 top
JP104  STAND-OFF  [STAND-OFF]  81.53,107.44 0 top
JP105  FIDUCIAL1X2  [FIDUCIAL-1X2]  83.19,85.47 0 top
JP106  FIDUCIAL1X2  [FIDUCIAL-1X2]  59.44,109.22 0 top
JP107  FIDUCIAL1X2  [FIDUCIAL-1X2]  59.44,109.22 0 bottom
JP108  FIDUCIAL1X2  [FIDUCIAL-1X2]  83.19,85.47 0 bottom
JP109  STAND-OFF  [STAND-OFF]  87.12,107.44 0 top
JP110  STAND-OFF  [STAND-OFF]  107.44,107.44 0 top
JP111  FIDUCIAL1X2  [FIDUCIAL-1X2]  109.09,85.47 0 top
JP112  FIDUCIAL1X2  [FIDUCIAL-1X2]  85.34,109.22 0 top
JP113  FIDUCIAL1X2  [FIDUCIAL-1X2]  85.34,109.22 0 bottom
JP114  FIDUCIAL1X2  [FIDUCIAL-1X2]  109.09,85.47 0 bottom
JP115  STAND-OFF  [STAND-OFF]  113.03,107.44 0 top
JP116  STAND-OFF  [STAND-OFF]  133.35,107.44 0 top
JP117  FIDUCIAL1X2  [FIDUCIAL-1X2]  135,85.47 0 top
JP118  FIDUCIAL1X2  [FIDUCIAL-1X2]  111.25,109.22 0 top
JP119  FIDUCIAL1X2  [FIDUCIAL-1X2]  111.25,109.22 0 bottom
JP120  FIDUCIAL1X2  [FIDUCIAL-1X2]  135,85.47 0 bottom
JP121  STAND-OFF  [STAND-OFF]  9.4,133.35 0 top
JP122  STAND-OFF  [STAND-OFF]  29.72,133.35 0 top
JP123  FIDUCIAL1X2  [FIDUCIAL-1X2]  31.37,111.38 0 top
JP124  FIDUCIAL1X2  [FIDUCIAL-1X2]  7.62,135.13 0 top
JP125  FIDUCIAL1X2  [FIDUCIAL-1X2]  7.62,135.13 0 bottom
JP126  FIDUCIAL1X2  [FIDUCIAL-1X2]  31.37,111.38 0 bottom
JP127  STAND-OFF  [STAND-OFF]  35.31,133.35 0 top
JP128  STAND-OFF  [STAND-OFF]  55.63,133.35 0 top
JP129  FIDUCIAL1X2  [FIDUCIAL-1X2]  57.28,111.38 0 top
JP130  FIDUCIAL1X2  [FIDUCIAL-1X2]  33.53,135.13 0 top
JP131  FIDUCIAL1X2  [FIDUCIAL-1X2]  33.53,135.13 0 bottom
JP132  FIDUCIAL1X2  [FIDUCIAL-1X2]  57.28,111.38 0 bottom
JP133  STAND-OFF  [STAND-OFF]  61.21,133.35 0 top
JP134  STAND-OFF  [STAND-OFF]  81.53,133.35 0 top
JP135  FIDUCIAL1X2  [FIDUCIAL-1X2]  83.19,111.38 0 top
JP136  FIDUCIAL1X2  [FIDUCIAL-1X2]  59.44,135.13 0 top
JP137  FIDUCIAL1X2  [FIDUCIAL-1X2]  59.44,135.13 0 bottom
JP138  FIDUCIAL1X2  [FIDUCIAL-1X2]  83.19,111.38 0 bottom
JP139  STAND-OFF  [STAND-OFF]  87.12,133.35 0 top
JP140  STAND-OFF  [STAND-OFF]  107.44,133.35 0 top
JP141  FIDUCIAL1X2  [FIDUCIAL-1X2]  109.09,111.38 0 top
JP142  FIDUCIAL1X2  [FIDUCIAL-1X2]  85.34,135.13 0 top
JP143  FIDUCIAL1X2  [FIDUCIAL-1X2]  85.34,135.13 0 bottom
JP144  FIDUCIAL1X2  [FIDUCIAL-1X2]  109.09,111.38 0 bottom
JP145  STAND-OFF  [STAND-OFF]  113.03,133.35 0 top
JP146  STAND-OFF  [STAND-OFF]  133.35,133.35 0 top
JP147  FIDUCIAL1X2  [FIDUCIAL-1X2]  135,111.38 0 top
JP148  FIDUCIAL1X2  [FIDUCIAL-1X2]  111.25,135.13 0 top
JP149  FIDUCIAL1X2  [FIDUCIAL-1X2]  111.25,135.13 0 bottom
JP150  FIDUCIAL1X2  [FIDUCIAL-1X2]  135,111.38 0 bottom
LED  [SMT-JUMPER_2_NC_TRACE_SILK]  10.67,11.43 180 bottom
LED1  [SMT-JUMPER_2_NC_TRACE_SILK]  36.58,11.43 180 bottom
LED2  [SMT-JUMPER_2_NC_TRACE_SILK]  62.48,11.43 180 bottom
LED3  [SMT-JUMPER_2_NC_TRACE_SILK]  88.39,11.43 180 bottom
LED4  [SMT-JUMPER_2_NC_TRACE_SILK]  114.3,11.43 180 bottom
LED5  [SMT-JUMPER_2_NC_TRACE_SILK]  10.67,37.34 180 bottom
LED6  [SMT-JUMPER_2_NC_TRACE_SILK]  36.58,37.34 180 bottom
LED7  [SMT-JUMPER_2_NC_TRACE_SILK]  62.48,37.34 180 bottom
LED8  [SMT-JUMPER_2_NC_TRACE_SILK]  88.39,37.34 180 bottom
LED9  [SMT-JUMPER_2_NC_TRACE_SILK]  114.3,37.34 180 bottom
LED10  [SMT-JUMPER_2_NC_TRACE_SILK]  10.67,63.25 180 bottom
LED11  [SMT-JUMPER_2_NC_TRACE_SILK]  36.58,63.25 180 bottom
LED12  [SMT-JUMPER_2_NC_TRACE_SILK]  62.48,63.25 180 bottom
LED13  [SMT-JUMPER_2_NC_TRACE_SILK]  88.39,63.25 180 bottom
LED14  [SMT-JUMPER_2_NC_TRACE_SILK]  114.3,63.25 180 bottom
LED15  [SMT-JUMPER_2_NC_TRACE_SILK]  10.67,89.15 180 bottom
LED16  [SMT-JUMPER_2_NC_TRACE_SILK]  36.58,89.15 180 bottom
LED17  [SMT-JUMPER_2_NC_TRACE_SILK]  62.48,89.15 180 bottom
LED18  [SMT-JUMPER_2_NC_TRACE_SILK]  88.39,89.15 180 bottom
LED19  [SMT-JUMPER_2_NC_TRACE_SILK]  114.3,89.15 180 bottom
LED20  [SMT-JUMPER_2_NC_TRACE_SILK]  10.67,115.06 180 bottom
LED21  [SMT-JUMPER_2_NC_TRACE_SILK]  36.58,115.06 180 bottom
LED22  [SMT-JUMPER_2_NC_TRACE_SILK]  62.48,115.06 180 bottom
LED23  [SMT-JUMPER_2_NC_TRACE_SILK]  88.39,115.06 180 bottom
LED24  [SMT-JUMPER_2_NC_TRACE_SILK]  114.3,115.06 180 bottom
LED_TRIG  [SMT-JUMPER_2_NC_TRACE_SILK]  28.45,11.43 0 bottom
LED_TRIG1  [SMT-JUMPER_2_NC_TRACE_SILK]  54.36,11.43 0 bottom
LED_TRIG2  [SMT-JUMPER_2_NC_TRACE_SILK]  80.26,11.43 0 bottom
LED_TRIG3  [SMT-JUMPER_2_NC_TRACE_SILK]  106.17,11.43 0 bottom
LED_TRIG4  [SMT-JUMPER_2_NC_TRACE_SILK]  132.08,11.43 0 bottom
LED_TRIG5  [SMT-JUMPER_2_NC_TRACE_SILK]  28.45,37.34 0 bottom
LED_TRIG6  [SMT-JUMPER_2_NC_TRACE_SILK]  54.36,37.34 0 bottom
LED_TRIG7  [SMT-JUMPER_2_NC_TRACE_SILK]  80.26,37.34 0 bottom
LED_TRIG8  [SMT-JUMPER_2_NC_TRACE_SILK]  106.17,37.34 0 bottom
LED_TRIG9  [SMT-JUMPER_2_NC_TRACE_SILK]  132.08,37.34 0 bottom
LED_TRIG10  [SMT-JUMPER_2_NC_TRACE_SILK]  28.45,63.25 0 bottom
LED_TRIG11  [SMT-JUMPER_2_NC_TRACE_SILK]  54.36,63.25 0 bottom
LED_TRIG12  [SMT-JUMPER_2_NC_TRACE_SILK]  80.26,63.25 0 bottom
LED_TRIG13  [SMT-JUMPER_2_NC_TRACE_SILK]  106.17,63.25 0 bottom
LED_TRIG14  [SMT-JUMPER_2_NC_TRACE_SILK]  132.08,63.25 0 bottom
LED_TRIG15  [SMT-JUMPER_2_NC_TRACE_SILK]  28.45,89.15 0 bottom
LED_TRIG16  [SMT-JUMPER_2_NC_TRACE_SILK]  54.36,89.15 0 bottom
LED_TRIG17  [SMT-JUMPER_2_NC_TRACE_SILK]  80.26,89.15 0 bottom
LED_TRIG18  [SMT-JUMPER_2_NC_TRACE_SILK]  106.17,89.15 0 bottom
LED_TRIG19  [SMT-JUMPER_2_NC_TRACE_SILK]  132.08,89.15 0 bottom
LED_TRIG20  [SMT-JUMPER_2_NC_TRACE_SILK]  28.45,115.06 0 bottom
LED_TRIG21  [SMT-JUMPER_2_NC_TRACE_SILK]  54.36,115.06 0 bottom
LED_TRIG22  [SMT-JUMPER_2_NC_TRACE_SILK]  80.26,115.06 0 bottom
LED_TRIG23  [SMT-JUMPER_2_NC_TRACE_SILK]  106.17,115.06 0 bottom
LED_TRIG24  [SMT-JUMPER_2_NC_TRACE_SILK]  132.08,115.06 0 bottom
LOGO1  OSHW-LOGOMINI  [OSHW-LOGO-MINI]  29.08,24.64 0 bottom
LOGO2  SPECIAL_INSTRUCTIONS-ORDERING  [ORDERING_INSTRUCTIONS]  41.15,57.66 0 top
LOGO3  SPECIAL_INSTRUCTIONS-PRODUCTION  [PRODUCTION_INSTRUCTIONS]  41.15,112.27 0 top
LOGO4  OSHW-LOGOMINI  [OSHW-LOGO-MINI]  54.99,24.64 0 bottom
LOGO5  SPECIAL_INSTRUCTIONS-ORDERING  [ORDERING_INSTRUCTIONS]  67.06,57.66 0 top
LOGO6  SPECIAL_INSTRUCTIONS-PRODUCTION  [PRODUCTION_INSTRUCTIONS]  67.06,112.27 0 top
LOGO7  OSHW-LOGOMINI  [OSHW-LOGO-MINI]  80.9,24.64 0 bottom
LOGO8  SPECIAL_INSTRUCTIONS-ORDERING  [ORDERING_INSTRUCTIONS]  92.96,57.66 0 top
LOGO9  SPECIAL_INSTRUCTIONS-PRODUCTION  [PRODUCTION_INSTRUCTIONS]  92.96,112.27 0 top
LOGO10  OSHW-LOGOMINI  [OSHW-LOGO-MINI]  106.81,24.64 0 bottom
LOGO11  SPECIAL_INSTRUCTIONS-ORDERING  [ORDERING_INSTRUCTIONS]  118.87,57.66 0 top
LOGO12  SPECIAL_INSTRUCTIONS-PRODUCTION  [PRODUCTION_INSTRUCTIONS]  118.87,112.27 0 top
LOGO13  OSHW-LOGOMINI  [OSHW-LOGO-MINI]  132.72,24.64 0 bottom
LOGO14  SPECIAL_INSTRUCTIONS-ORDERING  [ORDERING_INSTRUCTIONS]  144.78,57.66 0 top
LOGO15  SPECIAL_INSTRUCTIONS-PRODUCTION  [PRODUCTION_INSTRUCTIONS]  144.78,112.27 0 top
LOGO16  OSHW-LOGOMINI  [OSHW-LOGO-MINI]  29.08,50.55 0 bottom
LOGO17  SPECIAL_INSTRUCTIONS-ORDERING  [ORDERING_INSTRUCTIONS]  41.15,83.57 0 top
LOGO18  SPECIAL_INSTRUCTIONS-PRODUCTION  [PRODUCTION_INSTRUCTIONS]  41.15,138.18 0 top
LOGO19  OSHW-LOGOMINI  [OSHW-LOGO-MINI]  54.99,50.55 0 bottom
LOGO20  SPECIAL_INSTRUCTIONS-ORDERING  [ORDERING_INSTRUCTIONS]  67.06,83.57 0 top
LOGO21  SPECIAL_INSTRUCTIONS-PRODUCTION  [PRODUCTION_INSTRUCTIONS]  67.06,138.18 0 top
LOGO22  OSHW-LOGOMINI  [OSHW-LOGO-MINI]  80.9,50.55 0 bottom
LOGO23  SPECIAL_INSTRUCTIONS-ORDERING  [ORDERING_INSTRUCTIONS]  92.96,83.57 0 top
LOGO24  SPECIAL_INSTRUCTIONS-PRODUCTION  [PRODUCTION_INSTRUCTIONS]  92.96,138.18 0 top
LOGO25  OSHW-LOGOMINI  [OSHW-LOGO-MINI]  106.81,50.55 0 bottom
LOGO26  SPECIAL_INSTRUCTIONS-ORDERING  [ORDERING_INSTRUCTIONS]  118.87,83.57 0 top
LOGO27  SPECIAL_INSTRUCTIONS-PRODUCTION  [PRODUCTION_INSTRUCTIONS]  118.87,138.18 0 top
LOGO28  OSHW-LOGOMINI  [OSHW-LOGO-MINI]  132.72,50.55 0 bottom
LOGO29  SPECIAL_INSTRUCTIONS-ORDERING  [ORDERING_INSTRUCTIONS]  144.78,83.57 0 top
LOGO30  SPECIAL_INSTRUCTIONS-PRODUCTION  [PRODUCTION_INSTRUCTIONS]  144.78,138.18 0 top
LOGO31  OSHW-LOGOMINI  [OSHW-LOGO-MINI]  29.08,76.45 0 bottom
LOGO32  SPECIAL_INSTRUCTIONS-ORDERING  [ORDERING_INSTRUCTIONS]  41.15,109.47 0 top
LOGO33  SPECIAL_INSTRUCTIONS-PRODUCTION  [PRODUCTION_INSTRUCTIONS]  41.15,164.08 0 top  (outside the outline)
LOGO34  OSHW-LOGOMINI  [OSHW-LOGO-MINI]  54.99,76.45 0 bottom
LOGO35  SPECIAL_INSTRUCTIONS-ORDERING  [ORDERING_INSTRUCTIONS]  67.06,109.47 0 top
LOGO36  SPECIAL_INSTRUCTIONS-PRODUCTION  [PRODUCTION_INSTRUCTIONS]  67.06,164.08 0 top  (outside the outline)
LOGO37  OSHW-LOGOMINI  [OSHW-LOGO-MINI]  80.9,76.45 0 bottom
LOGO38  SPECIAL_INSTRUCTIONS-ORDERING  [ORDERING_INSTRUCTIONS]  92.96,109.47 0 top
LOGO39  SPECIAL_INSTRUCTIONS-PRODUCTION  [PRODUCTION_INSTRUCTIONS]  92.96,164.08 0 top  (outside the outline)
LOGO40  OSHW-LOGOMINI  [OSHW-LOGO-MINI]  106.81,76.45 0 bottom
LOGO41  SPECIAL_INSTRUCTIONS-ORDERING  [ORDERING_INSTRUCTIONS]  118.87,109.47 0 top
LOGO42  SPECIAL_INSTRUCTIONS-PRODUCTION  [PRODUCTION_INSTRUCTIONS]  118.87,164.08 0 top  (outside the outline)
LOGO43  OSHW-LOGOMINI  [OSHW-LOGO-MINI]  132.72,76.45 0 bottom
LOGO44  SPECIAL_INSTRUCTIONS-ORDERING  [ORDERING_INSTRUCTIONS]  144.78,109.47 0 top
LOGO45  SPECIAL_INSTRUCTIONS-PRODUCTION  [PRODUCTION_INSTRUCTIONS]  144.78,164.08 0 top  (outside the outline)
LOGO46  OSHW-LOGOMINI  [OSHW-LOGO-MINI]  29.08,102.36 0 bottom
LOGO47  SPECIAL_INSTRUCTIONS-ORDERING  [ORDERING_INSTRUCTIONS]  41.15,135.38 0 top
LOGO48  SPECIAL_INSTRUCTIONS-PRODUCTION  [PRODUCTION_INSTRUCTIONS]  41.15,189.99 0 top  (outside the outline)
LOGO49  OSHW-LOGOMINI  [OSHW-LOGO-MINI]  54.99,102.36 0 bottom
LOGO50  SPECIAL_INSTRUCTIONS-ORDERING  [ORDERING_INSTRUCTIONS]  67.06,135.38 0 top
LOGO51  SPECIAL_INSTRUCTIONS-PRODUCTION  [PRODUCTION_INSTRUCTIONS]  67.06,189.99 0 top  (outside the outline)
LOGO52  OSHW-LOGOMINI  [OSHW-LOGO-MINI]  80.9,102.36 0 bottom
LOGO53  SPECIAL_INSTRUCTIONS-ORDERING  [ORDERING_INSTRUCTIONS]  92.96,135.38 0 top
LOGO54  SPECIAL_INSTRUCTIONS-PRODUCTION  [PRODUCTION_INSTRUCTIONS]  92.96,189.99 0 top  (outside the outline)
LOGO55  OSHW-LOGOMINI  [OSHW-LOGO-MINI]  106.81,102.36 0 bottom
LOGO56  SPECIAL_INSTRUCTIONS-ORDERING  [ORDERING_INSTRUCTIONS]  118.87,135.38 0 top
LOGO57  SPECIAL_INSTRUCTIONS-PRODUCTION  [PRODUCTION_INSTRUCTIONS]  118.87,189.99 0 top  (outside the outline)
LOGO58  OSHW-LOGOMINI  [OSHW-LOGO-MINI]  132.72,102.36 0 bottom
LOGO59  SPECIAL_INSTRUCTIONS-ORDERING  [ORDERING_INSTRUCTIONS]  144.78,135.38 0 top
LOGO60  SPECIAL_INSTRUCTIONS-PRODUCTION  [PRODUCTION_INSTRUCTIONS]  144.78,189.99 0 top  (outside the outline)
LOGO61  OSHW-LOGOMINI  [OSHW-LOGO-MINI]  29.08,128.27 0 bottom
LOGO62  SPECIAL_INSTRUCTIONS-ORDERING  [ORDERING_INSTRUCTIONS]  41.15,161.29 0 top  (outside the outline)
LOGO63  SPECIAL_INSTRUCTIONS-PRODUCTION  [PRODUCTION_INSTRUCTIONS]  41.15,215.9 0 top  (outside the outline)
LOGO64  OSHW-LOGOMINI  [OSHW-LOGO-MINI]  54.99,128.27 0 bottom
LOGO65  SPECIAL_INSTRUCTIONS-ORDERING  [ORDERING_INSTRUCTIONS]  67.06,161.29 0 top  (outside the outline)
LOGO66  SPECIAL_INSTRUCTIONS-PRODUCTION  [PRODUCTION_INSTRUCTIONS]  67.06,215.9 0 top  (outside the outline)
LOGO67  OSHW-LOGOMINI  [OSHW-LOGO-MINI]  80.9,128.27 0 bottom
LOGO68  SPECIAL_INSTRUCTIONS-ORDERING  [ORDERING_INSTRUCTIONS]  92.96,161.29 0 top  (outside the outline)
LOGO69  SPECIAL_INSTRUCTIONS-PRODUCTION  [PRODUCTION_INSTRUCTIONS]  92.96,215.9 0 top  (outside the outline)
LOGO70  OSHW-LOGOMINI  [OSHW-LOGO-MINI]  106.81,128.27 0 bottom
LOGO71  SPECIAL_INSTRUCTIONS-ORDERING  [ORDERING_INSTRUCTIONS]  118.87,161.29 0 top  (outside the outline)
LOGO72  SPECIAL_INSTRUCTIONS-PRODUCTION  [PRODUCTION_INSTRUCTIONS]  118.87,215.9 0 top  (outside the outline)
LOGO73  OSHW-LOGOMINI  [OSHW-LOGO-MINI]  132.72,128.27 0 bottom
LOGO74  SPECIAL_INSTRUCTIONS-ORDERING  [ORDERING_INSTRUCTIONS]  144.78,161.29 0 top  (outside the outline)
LOGO75  SPECIAL_INSTRUCTIONS-PRODUCTION  [PRODUCTION_INSTRUCTIONS]  144.78,215.9 0 top  (outside the outline)
MODE  MOMENTARY-SWITCH-SPST-SMD-4.6X2.8MM  [TACTILE_SWITCH_SMD_4.6X2.8MM]  8.89,24 270 top
MODE1  MOMENTARY-SWITCH-SPST-SMD-4.6X2.8MM  [TACTILE_SWITCH_SMD_4.6X2.8MM]  34.8,24 270 top
MODE2  MOMENTARY-SWITCH-SPST-SMD-4.6X2.8MM  [TACTILE_SWITCH_SMD_4.6X2.8MM]  60.71,24 270 top
MODE3  MOMENTARY-SWITCH-SPST-SMD-4.6X2.8MM  [TACTILE_SWITCH_SMD_4.6X2.8MM]  86.61,24 270 top
MODE4  MOMENTARY-SWITCH-SPST-SMD-4.6X2.8MM  [TACTILE_SWITCH_SMD_4.6X2.8MM]  112.52,24 270 top
MODE5  MOMENTARY-SWITCH-SPST-SMD-4.6X2.8MM  [TACTILE_SWITCH_SMD_4.6X2.8MM]  8.89,49.91 270 top
MODE6  MOMENTARY-SWITCH-SPST-SMD-4.6X2.8MM  [TACTILE_SWITCH_SMD_4.6X2.8MM]  34.8,49.91 270 top
MODE7  MOMENTARY-SWITCH-SPST-SMD-4.6X2.8MM  [TACTILE_SWITCH_SMD_4.6X2.8MM]  60.71,49.91 270 top
MODE8  MOMENTARY-SWITCH-SPST-SMD-4.6X2.8MM  [TACTILE_SWITCH_SMD_4.6X2.8MM]  86.61,49.91 270 top
MODE9  MOMENTARY-SWITCH-SPST-SMD-4.6X2.8MM  [TACTILE_SWITCH_SMD_4.6X2.8MM]  112.52,49.91 270 top
MODE10  MOMENTARY-SWITCH-SPST-SMD-4.6X2.8MM  [TACTILE_SWITCH_SMD_4.6X2.8MM]  8.89,75.82 270 top
MODE11  MOMENTARY-SWITCH-SPST-SMD-4.6X2.8MM  [TACTILE_SWITCH_SMD_4.6X2.8MM]  34.8,75.82 270 top
MODE12  MOMENTARY-SWITCH-SPST-SMD-4.6X2.8MM  [TACTILE_SWITCH_SMD_4.6X2.8MM]  60.71,75.82 270 top
MODE13  MOMENTARY-SWITCH-SPST-SMD-4.6X2.8MM  [TACTILE_SWITCH_SMD_4.6X2.8MM]  86.61,75.82 270 top
MODE14  MOMENTARY-SWITCH-SPST-SMD-4.6X2.8MM  [TACTILE_SWITCH_SMD_4.6X2.8MM]  112.52,75.82 270 top
MODE15  MOMENTARY-SWITCH-SPST-SMD-4.6X2.8MM  [TACTILE_SWITCH_SMD_4.6X2.8MM]  8.89,101.73 270 top
MODE16  MOMENTARY-SWITCH-SPST-SMD-4.6X2.8MM  [TACTILE_SWITCH_SMD_4.6X2.8MM]  34.8,101.73 270 top
MODE17  MOMENTARY-SWITCH-SPST-SMD-4.6X2.8MM  [TACTILE_SWITCH_SMD_4.6X2.8MM]  60.71,101.73 270 top
MODE18  MOMENTARY-SWITCH-SPST-SMD-4.6X2.8MM  [TACTILE_SWITCH_SMD_4.6X2.8MM]  86.61,101.73 270 top
MODE19  MOMENTARY-SWITCH-SPST-SMD-4.6X2.8MM  [TACTILE_SWITCH_SMD_4.6X2.8MM]  112.52,101.73 270 top
MODE20  MOMENTARY-SWITCH-SPST-SMD-4.6X2.8MM  [TACTILE_SWITCH_SMD_4.6X2.8MM]  8.89,127.64 270 top
MODE21  MOMENTARY-SWITCH-SPST-SMD-4.6X2.8MM  [TACTILE_SWITCH_SMD_4.6X2.8MM]  34.8,127.64 270 top
MODE22  MOMENTARY-SWITCH-SPST-SMD-4.6X2.8MM  [TACTILE_SWITCH_SMD_4.6X2.8MM]  60.71,127.64 270 top
MODE23  MOMENTARY-SWITCH-SPST-SMD-4.6X2.8MM  [TACTILE_SWITCH_SMD_4.6X2.8MM]  86.61,127.64 270 top
MODE24  MOMENTARY-SWITCH-SPST-SMD-4.6X2.8MM  [TACTILE_SWITCH_SMD_4.6X2.8MM]  112.52,127.64 270 top
MODE.  [1X01_NO_SILK]  15.75,30.99 0 top
MODE.1  [1X01_NO_SILK]  41.66,30.99 0 top
MODE.2  [1X01_NO_SILK]  67.56,30.99 0 top
MODE.3  [1X01_NO_SILK]  93.47,30.99 0 top
MODE.4  [1X01_NO_SILK]  119.38,30.99 0 top
MODE.5  [1X01_NO_SILK]  15.75,56.9 0 top
MODE.6  [1X01_NO_SILK]  41.66,56.9 0 top
MODE.7  [1X01_NO_SILK]  67.56,56.9 0 top
MODE.8  [1X01_NO_SILK]  93.47,56.9 0 top
MODE.9  [1X01_NO_SILK]  119.38,56.9 0 top
MODE.10  [1X01_NO_SILK]  15.75,82.8 0 top
MODE.11  [1X01_NO_SILK]  41.66,82.8 0 top
MODE.12  [1X01_NO_SILK]  67.56,82.8 0 top
MODE.13  [1X01_NO_SILK]  93.47,82.8 0 top
MODE.14  [1X01_NO_SILK]  119.38,82.8 0 top
MODE.15  [1X01_NO_SILK]  15.75,108.71 0 top
MODE.16  [1X01_NO_SILK]  41.66,108.71 0 top
MODE.17  [1X01_NO_SILK]  67.56,108.71 0 top
MODE.18  [1X01_NO_SILK]  93.47,108.71 0 top
MODE.19  [1X01_NO_SILK]  119.38,108.71 0 top
MODE.20  [1X01_NO_SILK]  15.75,134.62 0 top
MODE.21  [1X01_NO_SILK]  41.66,134.62 0 top
MODE.22  [1X01_NO_SILK]  67.56,134.62 0 top
MODE.23  [1X01_NO_SILK]  93.47,134.62 0 top
MODE.24  [1X01_NO_SILK]  119.38,134.62 0 top
Q1  310mA/60V/1.6Ω  [SOT323]  29.08,23.37 270 top
Q2  310mA/60V/1.6Ω  [SOT323]  54.99,23.37 270 top
Q3  310mA/60V/1.6Ω  [SOT323]  80.9,23.37 270 top
Q4  310mA/60V/1.6Ω  [SOT323]  106.81,23.37 270 top
Q5  310mA/60V/1.6Ω  [SOT323]  132.72,23.37 270 top
Q6  310mA/60V/1.6Ω  [SOT323]  29.08,49.28 270 top
Q7  310mA/60V/1.6Ω  [SOT323]  54.99,49.28 270 top
Q8  310mA/60V/1.6Ω  [SOT323]  80.9,49.28 270 top
Q9  310mA/60V/1.6Ω  [SOT323]  106.81,49.28 270 top
Q10  310mA/60V/1.6Ω  [SOT323]  132.72,49.28 270 top
Q11  310mA/60V/1.6Ω  [SOT323]  29.08,75.18 270 top
Q12  310mA/60V/1.6Ω  [SOT323]  54.99,75.18 270 top
Q13  310mA/60V/1.6Ω  [SOT323]  80.9,75.18 270 top
Q14  310mA/60V/1.6Ω  [SOT323]  106.81,75.18 270 top
Q15  310mA/60V/1.6Ω  [SOT323]  132.72,75.18 270 top
Q16  310mA/60V/1.6Ω  [SOT323]  29.08,101.09 270 top
Q17  310mA/60V/1.6Ω  [SOT323]  54.99,101.09 270 top
Q18  310mA/60V/1.6Ω  [SOT323]  80.9,101.09 270 top
Q19  310mA/60V/1.6Ω  [SOT323]  106.81,101.09 270 top
Q20  310mA/60V/1.6Ω  [SOT323]  132.72,101.09 270 top
Q21  310mA/60V/1.6Ω  [SOT323]  29.08,127 270 top
Q22  310mA/60V/1.6Ω  [SOT323]  54.99,127 270 top
Q23  310mA/60V/1.6Ω  [SOT323]  80.9,127 270 top
Q24  310mA/60V/1.6Ω  [SOT323]  106.81,127 270 top
Q25  310mA/60V/1.6Ω  [SOT323]  132.72,127 270 top
R1  1k  [0603]  10.67,11.94 180 top
R2  2.2k  [0603]  14.48,22.99 90 top
R3  2.2k  [0603]  19.56,15.11 90 top
R4  2.2k  [0603]  22.1,15.11 90 top
R5  20k  [0603]  24,23.37 0 top
R6  1k  [0603]  28.45,11.94 0 top
R7  2.2k  [0603]  45.47,15.11 90 top
R8  2.2k  [0603]  48.01,15.11 90 top
R9  1k  [0603]  36.58,11.94 180 top
R10  2.2k  [0603]  40.39,22.99 90 top
R11  20k  [0603]  49.91,23.37 0 top
R12  1k  [0603]  54.36,11.94 0 top
R13  2.2k  [0603]  71.37,15.11 90 top
R14  2.2k  [0603]  73.91,15.11 90 top
R15  1k  [0603]  62.48,11.94 180 top
R16  2.2k  [0603]  66.29,22.99 90 top
R17  20k  [0603]  75.82,23.37 0 top
R18  1k  [0603]  80.26,11.94 0 top
R19  2.2k  [0603]  97.28,15.11 90 top
R20  2.2k  [0603]  99.82,15.11 90 top
R21  1k  [0603]  88.39,11.94 180 top
R22  2.2k  [0603]  92.2,22.99 90 top
R23  20k  [0603]  101.73,23.37 0 top
R24  1k  [0603]  106.17,11.94 0 top
R25  2.2k  [0603]  123.19,15.11 90 top
R26  2.2k  [0603]  125.73,15.11 90 top
R27  1k  [0603]  114.3,11.94 180 top
R28  2.2k  [0603]  118.11,22.99 90 top
R29  20k  [0603]  127.64,23.37 0 top
R30  1k  [0603]  132.08,11.94 0 top
R31  2.2k  [0603]  19.56,41.02 90 top
R32  2.2k  [0603]  22.1,41.02 90 top
R33  1k  [0603]  10.67,37.85 180 top
R34  2.2k  [0603]  14.48,48.89 90 top
R35  20k  [0603]  24,49.28 0 top
R36  1k  [0603]  28.45,37.85 0 top
R37  2.2k  [0603]  45.47,41.02 90 top
R38  2.2k  [0603]  48.01,41.02 90 top
R39  1k  [0603]  36.58,37.85 180 top
R40  2.2k  [0603]  40.39,48.89 90 top
R41  20k  [0603]  49.91,49.28 0 top
R42  1k  [0603]  54.36,37.85 0 top
R43  2.2k  [0603]  71.37,41.02 90 top
R44  2.2k  [0603]  73.91,41.02 90 top
R45  1k  [0603]  62.48,37.85 180 top
R46  2.2k  [0603]  66.29,48.89 90 top
R47  20k  [0603]  75.82,49.28 0 top
R48  1k  [0603]  80.26,37.85 0 top
R49  2.2k  [0603]  97.28,41.02 90 top
R50  2.2k  [0603]  99.82,41.02 90 top
R51  1k  [0603]  88.39,37.85 180 top
R52  2.2k  [0603]  92.2,48.89 90 top
R53  20k  [0603]  101.73,49.28 0 top
R54  1k  [0603]  106.17,37.85 0 top
R55  2.2k  [0603]  123.19,41.02 90 top
R56  2.2k  [0603]  125.73,41.02 90 top
R57  1k  [0603]  114.3,37.85 180 top
R58  2.2k  [0603]  118.11,48.89 90 top
R59  20k  [0603]  127.64,49.28 0 top
R60  1k  [0603]  132.08,37.85 0 top
R61  2.2k  [0603]  19.56,66.93 90 top
R62  2.2k  [0603]  22.1,66.93 90 top
R63  1k  [0603]  10.67,63.75 180 top
R64  2.2k  [0603]  14.48,74.8 90 top
R65  20k  [0603]  24,75.18 0 top
R66  1k  [0603]  28.45,63.75 0 top
R67  2.2k  [0603]  45.47,66.93 90 top
R68  2.2k  [0603]  48.01,66.93 90 top
R69  1k  [0603]  36.58,63.75 180 top
R70  2.2k  [0603]  40.39,74.8 90 top
R71  20k  [0603]  49.91,75.18 0 top
R72  1k  [0603]  54.36,63.75 0 top
R73  2.2k  [0603]  71.37,66.93 90 top
R74  2.2k  [0603]  73.91,66.93 90 top
R75  1k  [0603]  62.48,63.75 180 top
R76  2.2k  [0603]  66.29,74.8 90 top
R77  20k  [0603]  75.82,75.18 0 top
R78  1k  [0603]  80.26,63.75 0 top
R79  2.2k  [0603]  97.28,66.93 90 top
R80  2.2k  [0603]  99.82,66.93 90 top
R81  1k  [0603]  88.39,63.75 180 top
R82  2.2k  [0603]  92.2,74.8 90 top
R83  20k  [0603]  101.73,75.18 0 top
R84  1k  [0603]  106.17,63.75 0 top
R85  2.2k  [0603]  123.19,66.93 90 top
R86  2.2k  [0603]  125.73,66.93 90 top
R87  1k  [0603]  114.3,63.75 180 top
R88  2.2k  [0603]  118.11,74.8 90 top
R89  20k  [0603]  127.64,75.18 0 top
R90  1k  [0603]  132.08,63.75 0 top
R91  2.2k  [0603]  19.56,92.84 90 top
R92  2.2k  [0603]  22.1,92.84 90 top
R93  1k  [0603]  10.67,89.66 180 top
R94  2.2k  [0603]  14.48,100.71 90 top
R95  20k  [0603]  24,101.09 0 top
R96  1k  [0603]  28.45,89.66 0 top
R97  2.2k  [0603]  45.47,92.84 90 top
R98  2.2k  [0603]  48.01,92.84 90 top
R99  1k  [0603]  36.58,89.66 180 top
R100  2.2k  [0603]  40.39,100.71 90 top
R101  20k  [0603]  49.91,101.09 0 top
R102  1k  [0603]  54.36,89.66 0 top
R103  2.2k  [0603]  71.37,92.84 90 top
R104  2.2k  [0603]  73.91,92.84 90 top
R105  1k  [0603]  62.48,89.66 180 top
R106  2.2k  [0603]  66.29,100.71 90 top
R107  20k  [0603]  75.82,101.09 0 top
R108  1k  [0603]  80.26,89.66 0 top
R109  2.2k  [0603]  97.28,92.84 90 top
R110  2.2k  [0603]  99.82,92.84 90 top
R111  1k  [0603]  88.39,89.66 180 top
R112  2.2k  [0603]  92.2,100.71 90 top
R113  20k  [0603]  101.73,101.09 0 top
R114  1k  [0603]  106.17,89.66 0 top
R115  2.2k  [0603]  123.19,92.84 90 top
R116  2.2k  [0603]  125.73,92.84 90 top
R117  1k  [0603]  114.3,89.66 180 top
R118  2.2k  [0603]  118.11,100.71 90 top
R119  20k  [0603]  127.64,101.09 0 top
R120  1k  [0603]  132.08,89.66 0 top
R121  2.2k  [0603]  19.56,118.75 90 top
R122  2.2k  [0603]  22.1,118.75 90 top
R123  1k  [0603]  10.67,115.57 180 top
R124  2.2k  [0603]  14.48,126.62 90 top
R125  20k  [0603]  24,127 0 top
R126  1k  [0603]  28.45,115.57 0 top
R127  2.2k  [0603]  45.47,118.75 90 top
R128  2.2k  [0603]  48.01,118.75 90 top
R129  1k  [0603]  36.58,115.57 180 top
R130  2.2k  [0603]  40.39,126.62 90 top
R131  20k  [0603]  49.91,127 0 top
R132  1k  [0603]  54.36,115.57 0 top
R133  2.2k  [0603]  71.37,118.75 90 top
R134  2.2k  [0603]  73.91,118.75 90 top
R135  1k  [0603]  62.48,115.57 180 top
R136  2.2k  [0603]  66.29,126.62 90 top
R137  20k  [0603]  75.82,127 0 top
R138  1k  [0603]  80.26,115.57 0 top
R139  2.2k  [0603]  97.28,118.75 90 top
R140  2.2k  [0603]  99.82,118.75 90 top
R141  1k  [0603]  88.39,115.57 180 top
R142  2.2k  [0603]  92.2,126.62 90 top
R143  20k  [0603]  101.73,127 0 top
R144  1k  [0603]  106.17,115.57 0 top
R145  2.2k  [0603]  123.19,118.75 90 top
R146  2.2k  [0603]  125.73,118.75 90 top
R147  1k  [0603]  114.3,115.57 180 top
R148  2.2k  [0603]  118.11,126.62 90 top
R149  20k  [0603]  127.64,127 0 top
R150  1k  [0603]  132.08,115.57 0 top
THRESH  [SMT-JUMPER_2_NC_TRACE_SILK]  24,23.11 0 bottom
THRESH1  [SMT-JUMPER_2_NC_TRACE_SILK]  49.91,23.11 0 bottom
THRESH2  [SMT-JUMPER_2_NC_TRACE_SILK]  75.82,23.11 0 bottom
THRESH3  [SMT-JUMPER_2_NC_TRACE_SILK]  101.73,23.11 0 bottom
THRESH4  [SMT-JUMPER_2_NC_TRACE_SILK]  127.64,23.11 0 bottom
THRESH5  [SMT-JUMPER_2_NC_TRACE_SILK]  24,49.02 0 bottom
THRESH6  [SMT-JUMPER_2_NC_TRACE_SILK]  49.91,49.02 0 bottom
THRESH7  [SMT-JUMPER_2_NC_TRACE_SILK]  75.82,49.02 0 bottom
THRESH8  [SMT-JUMPER_2_NC_TRACE_SILK]  101.73,49.02 0 bottom
THRESH9  [SMT-JUMPER_2_NC_TRACE_SILK]  127.64,49.02 0 bottom
THRESH10  [SMT-JUMPER_2_NC_TRACE_SILK]  24,74.93 0 bottom
THRESH11  [SMT-JUMPER_2_NC_TRACE_SILK]  49.91,74.93 0 bottom
THRESH12  [SMT-JUMPER_2_NC_TRACE_SILK]  75.82,74.93 0 bottom
THRESH13  [SMT-JUMPER_2_NC_TRACE_SILK]  101.73,74.93 0 bottom
THRESH14  [SMT-JUMPER_2_NC_TRACE_SILK]  127.64,74.93 0 bottom
THRESH15  [SMT-JUMPER_2_NC_TRACE_SILK]  24,100.84 0 bottom
THRESH16  [SMT-JUMPER_2_NC_TRACE_SILK]  49.91,100.84 0 bottom
THRESH17  [SMT-JUMPER_2_NC_TRACE_SILK]  75.82,100.84 0 bottom
THRESH18  [SMT-JUMPER_2_NC_TRACE_SILK]  101.73,100.84 0 bottom
THRESH19  [SMT-JUMPER_2_NC_TRACE_SILK]  127.64,100.84 0 bottom
THRESH20  [SMT-JUMPER_2_NC_TRACE_SILK]  24,126.75 0 bottom
THRESH21  [SMT-JUMPER_2_NC_TRACE_SILK]  49.91,126.75 0 bottom
THRESH22  [SMT-JUMPER_2_NC_TRACE_SILK]  75.82,126.75 0 bottom
THRESH23  [SMT-JUMPER_2_NC_TRACE_SILK]  101.73,126.75 0 bottom
THRESH24  [SMT-JUMPER_2_NC_TRACE_SILK]  127.64,126.75 0 bottom
TRIG  [1X01_NO_SILK]  25.91,30.99 0 top
TRIG1  [1X01_NO_SILK]  51.82,30.99 0 top
TRIG2  [1X01_NO_SILK]  77.72,30.99 0 top
TRIG3  [1X01_NO_SILK]  103.63,30.99 0 top
TRIG4  [1X01_NO_SILK]  129.54,30.99 0 top
TRIG5  [1X01_NO_SILK]  25.91,56.9 0 top
TRIG6  [1X01_NO_SILK]  51.82,56.9 0 top
TRIG7  [1X01_NO_SILK]  77.72,56.9 0 top
TRIG8  [1X01_NO_SILK]  103.63,56.9 0 top
TRIG9  [1X01_NO_SILK]  129.54,56.9 0 top
TRIG10  [1X01_NO_SILK]  25.91,82.8 0 top
TRIG11  [1X01_NO_SILK]  51.82,82.8 0 top
TRIG12  [1X01_NO_SILK]  77.72,82.8 0 top
TRIG13  [1X01_NO_SILK]  103.63,82.8 0 top
TRIG14  [1X01_NO_SILK]  129.54,82.8 0 top
TRIG15  [1X01_NO_SILK]  25.91,108.71 0 top
TRIG16  [1X01_NO_SILK]  51.82,108.71 0 top
TRIG17  [1X01_NO_SILK]  77.72,108.71 0 top
TRIG18  [1X01_NO_SILK]  103.63,108.71 0 top
TRIG19  [1X01_NO_SILK]  129.54,108.71 0 top
TRIG20  [1X01_NO_SILK]  25.91,134.62 0 top
TRIG21  [1X01_NO_SILK]  51.82,134.62 0 top
TRIG22  [1X01_NO_SILK]  77.72,134.62 0 top
TRIG23  [1X01_NO_SILK]  103.63,134.62 0 top
TRIG24  [1X01_NO_SILK]  129.54,134.62 0 top
U1  VM1010  [VM1010]  19.56,23.37 270 top
U2  PCA9536  [MSOP8]  19.56,18.8 0 top
U3  PCA9536  [MSOP8]  45.47,18.8 0 top
U4  VM1010  [VM1010]  45.47,23.37 270 top
U5  PCA9536  [MSOP8]  71.37,18.8 0 top
U6  VM1010  [VM1010]  71.37,23.37 270 top
U7  PCA9536  [MSOP8]  97.28,18.8 0 top
U8  VM1010  [VM1010]  97.28,23.37 270 top
U9  PCA9536  [MSOP8]  123.19,18.8 0 top
U10  VM1010  [VM1010]  123.19,23.37 270 top
U11  PCA9536  [MSOP8]  19.56,44.7 0 top
U12  VM1010  [VM1010]  19.56,49.28 270 top
U13  PCA9536  [MSOP8]  45.47,44.7 0 top
U14  VM1010  [VM1010]  45.47,49.28 270 top
U15  PCA9536  [MSOP8]  71.37,44.7 0 top
U16  VM1010  [VM1010]  71.37,49.28 270 top
U17  PCA9536  [MSOP8]  97.28,44.7 0 top
U18  VM1010  [VM1010]  97.28,49.28 270 top
U19  PCA9536  [MSOP8]  123.19,44.7 0 top
U20  VM1010  [VM1010]  123.19,49.28 270 top
U21  PCA9536  [MSOP8]  19.56,70.61 0 top
U22  VM1010  [VM1010]  19.56,75.18 270 top
U23  PCA9536  [MSOP8]  45.47,70.61 0 top
U24  VM1010  [VM1010]  45.47,75.18 270 top
U25  PCA9536  [MSOP8]  71.37,70.61 0 top
U26  VM1010  [VM1010]  71.37,75.18 270 top
U27  PCA9536  [MSOP8]  97.28,70.61 0 top
U28  VM1010  [VM1010]  97.28,75.18 270 top
U29  PCA9536  [MSOP8]  123.19,70.61 0 top
U30  VM1010  [VM1010]  123.19,75.18 270 top
U31  PCA9536  [MSOP8]  19.56,96.52 0 top
U32  VM1010  [VM1010]  19.56,101.09 270 top
U33  PCA9536  [MSOP8]  45.47,96.52 0 top
U34  VM1010  [VM1010]  45.47,101.09 270 top
U35  PCA9536  [MSOP8]  71.37,96.52 0 top
U36  VM1010  [VM1010]  71.37,101.09 270 top
U37  PCA9536  [MSOP8]  97.28,96.52 0 top
U38  VM1010  [VM1010]  97.28,101.09 270 top
U39  PCA9536  [MSOP8]  123.19,96.52 0 top
U40  VM1010  [VM1010]  123.19,101.09 270 top
U41  PCA9536  [MSOP8]  19.56,122.43 0 top
U42  VM1010  [VM1010]  19.56,127 270 top
U43  PCA9536  [MSOP8]  45.47,122.43 0 top
U44  VM1010  [VM1010]  45.47,127 270 top
U45  PCA9536  [MSOP8]  71.37,122.43 0 top
U46  VM1010  [VM1010]  71.37,127 270 top
U47  PCA9536  [MSOP8]  97.28,122.43 0 top
U48  VM1010  [VM1010]  97.28,127 270 top
U49  PCA9536  [MSOP8]  123.19,122.43 0 top
U50  VM1010  [VM1010]  123.19,127 270 top
U$1  [#GA1#0]  18.29,28.45 270 top
U$2  SPARKX-LOGO4  [SPARKX-MEDIUM]  19.56,18.67 0 bottom
U$3  [#GA1#0]  18.29,28.45 270 bottom
U$4  [#GA2#0]  20.83,28.32 270 top